# EAGLE board AM6548 (EAGLE 9.6.0), part 1 of 8
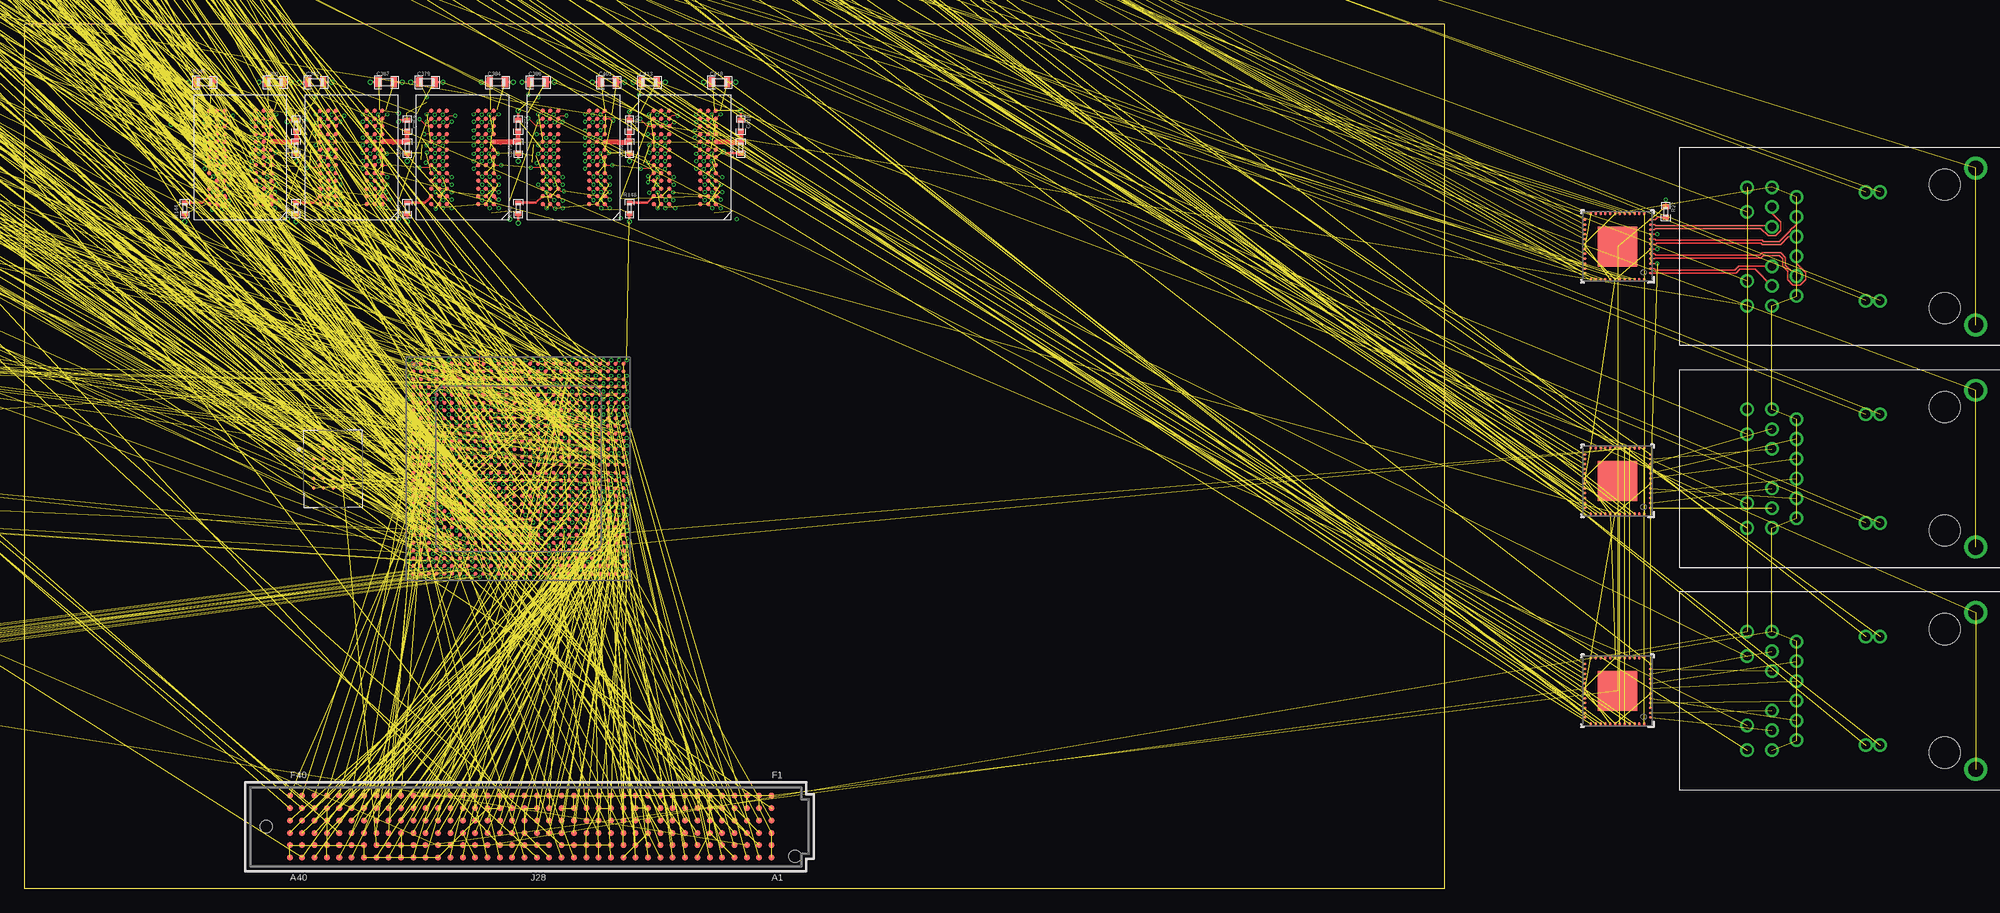
[diagram p0: board, top side]
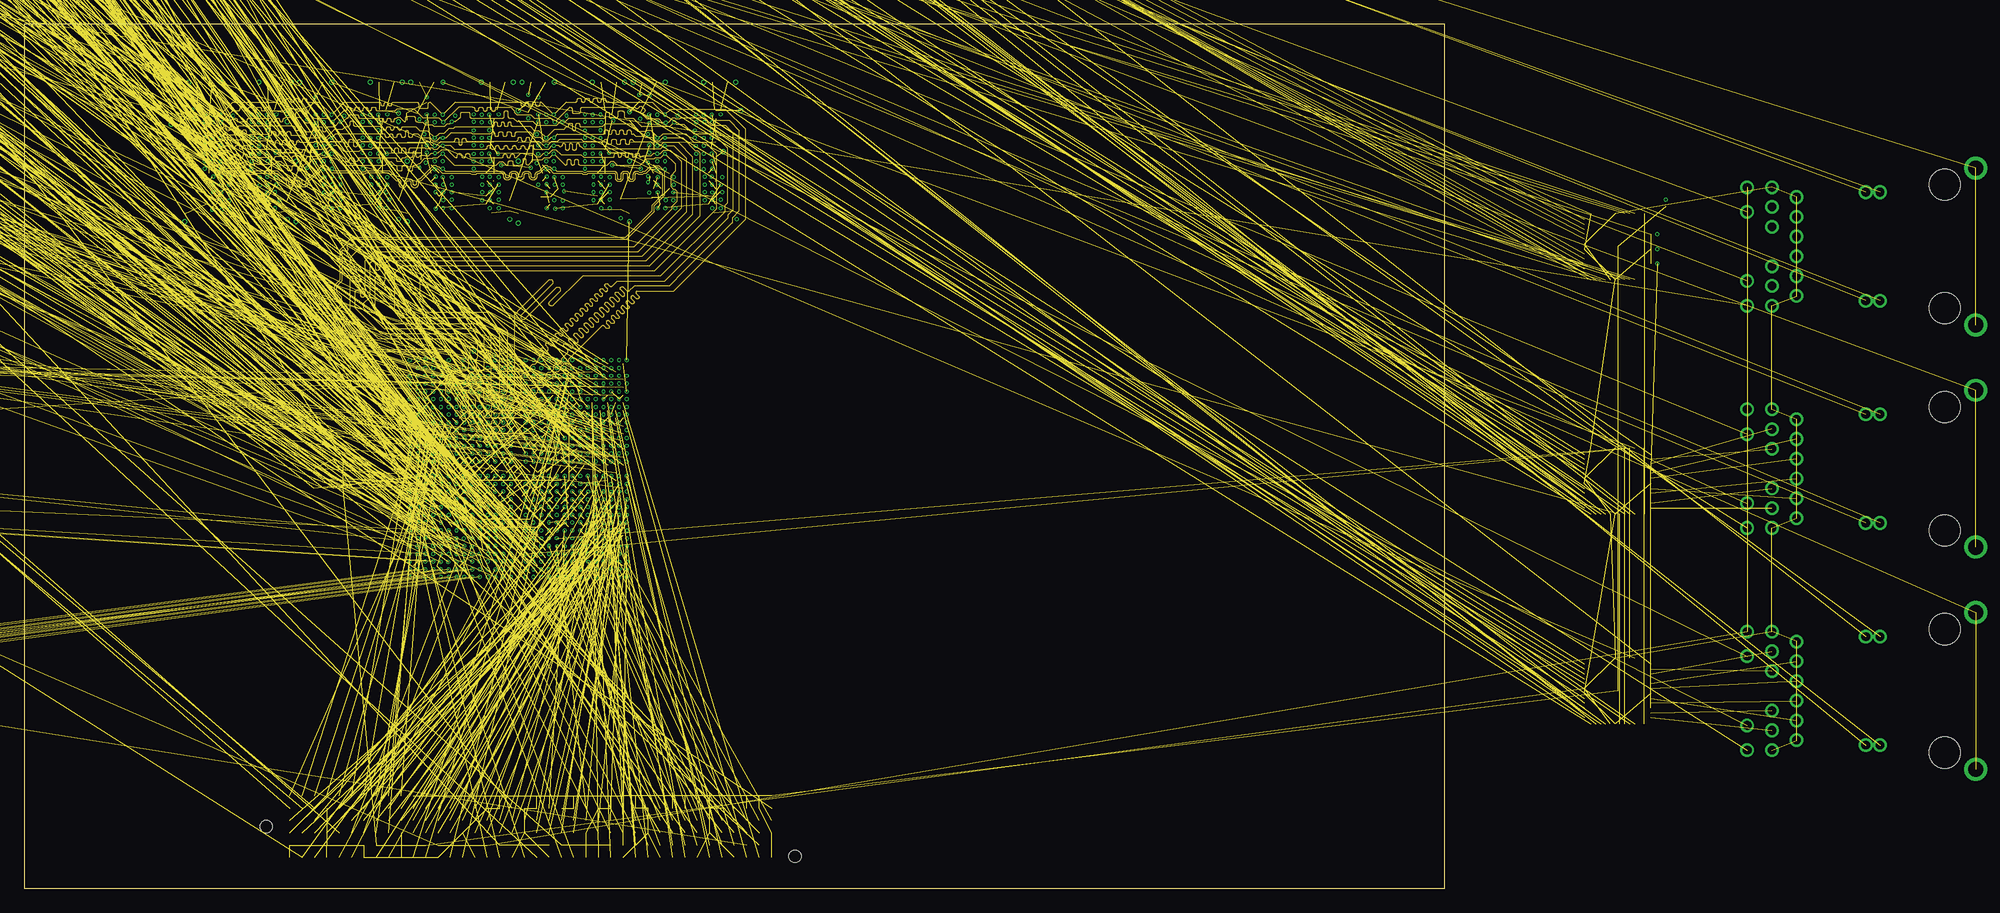
[diagram p1: board, inner layer Route3]
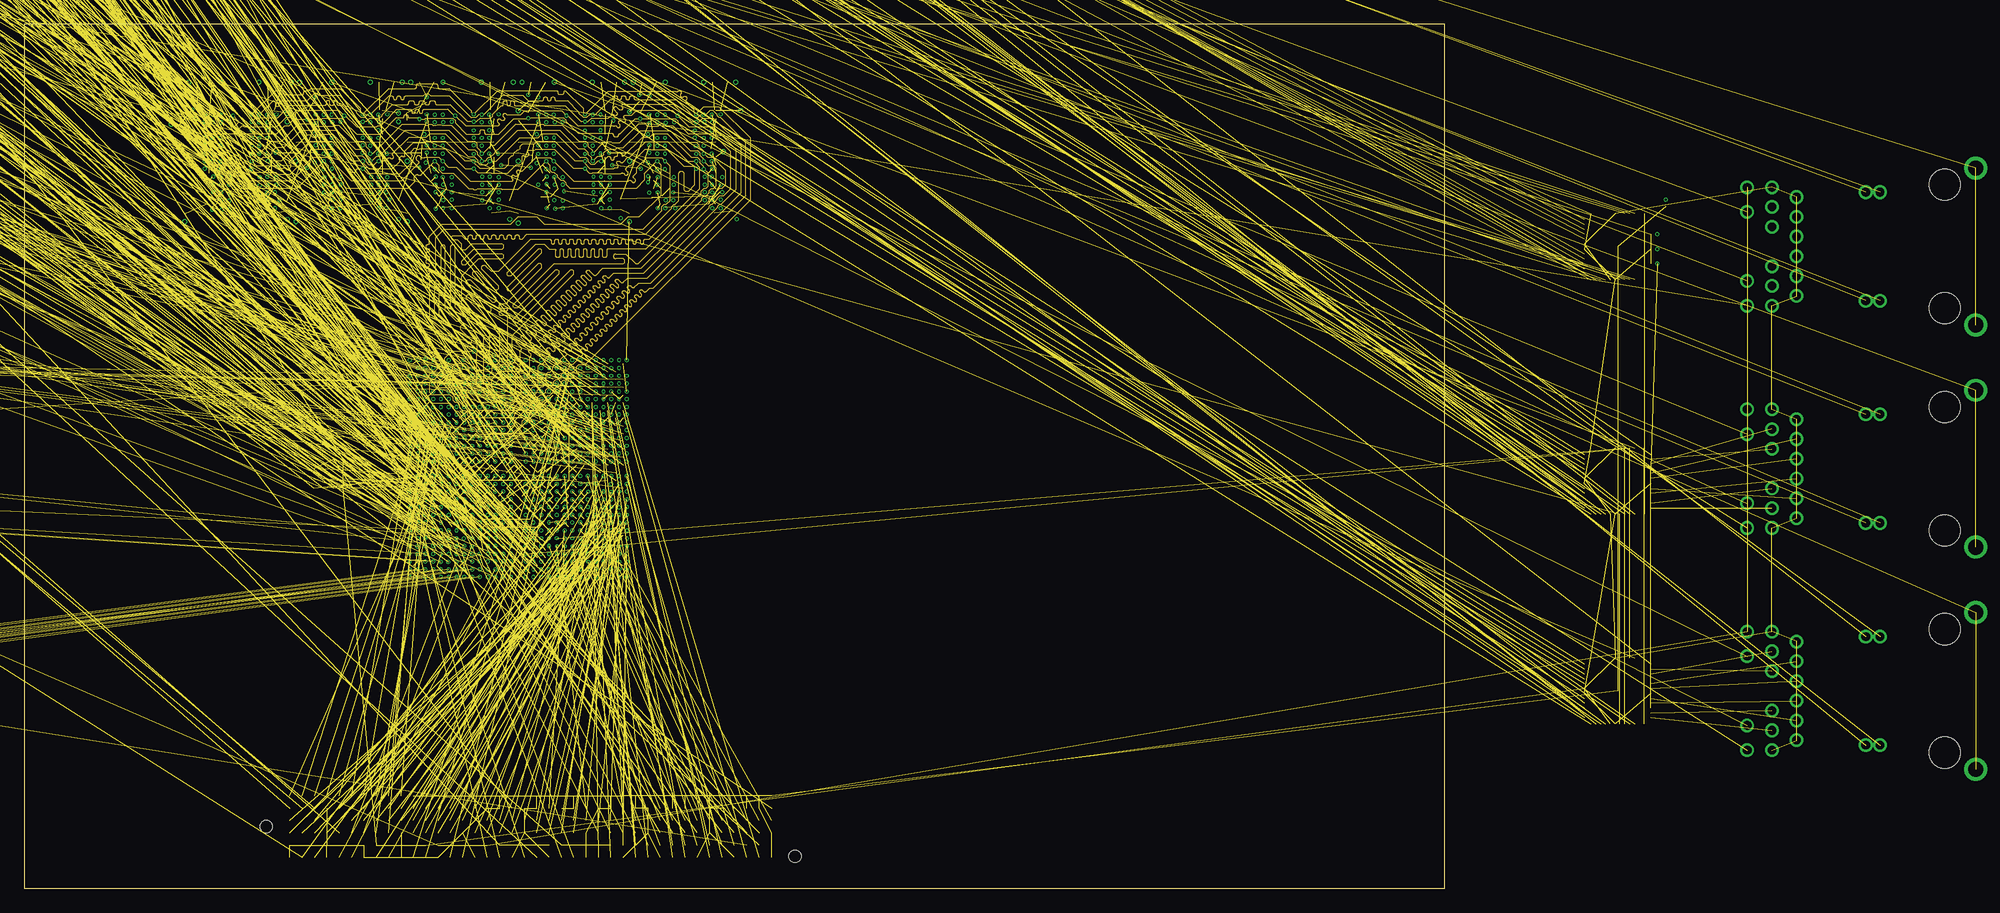
[diagram p2: board, inner layer Route5]
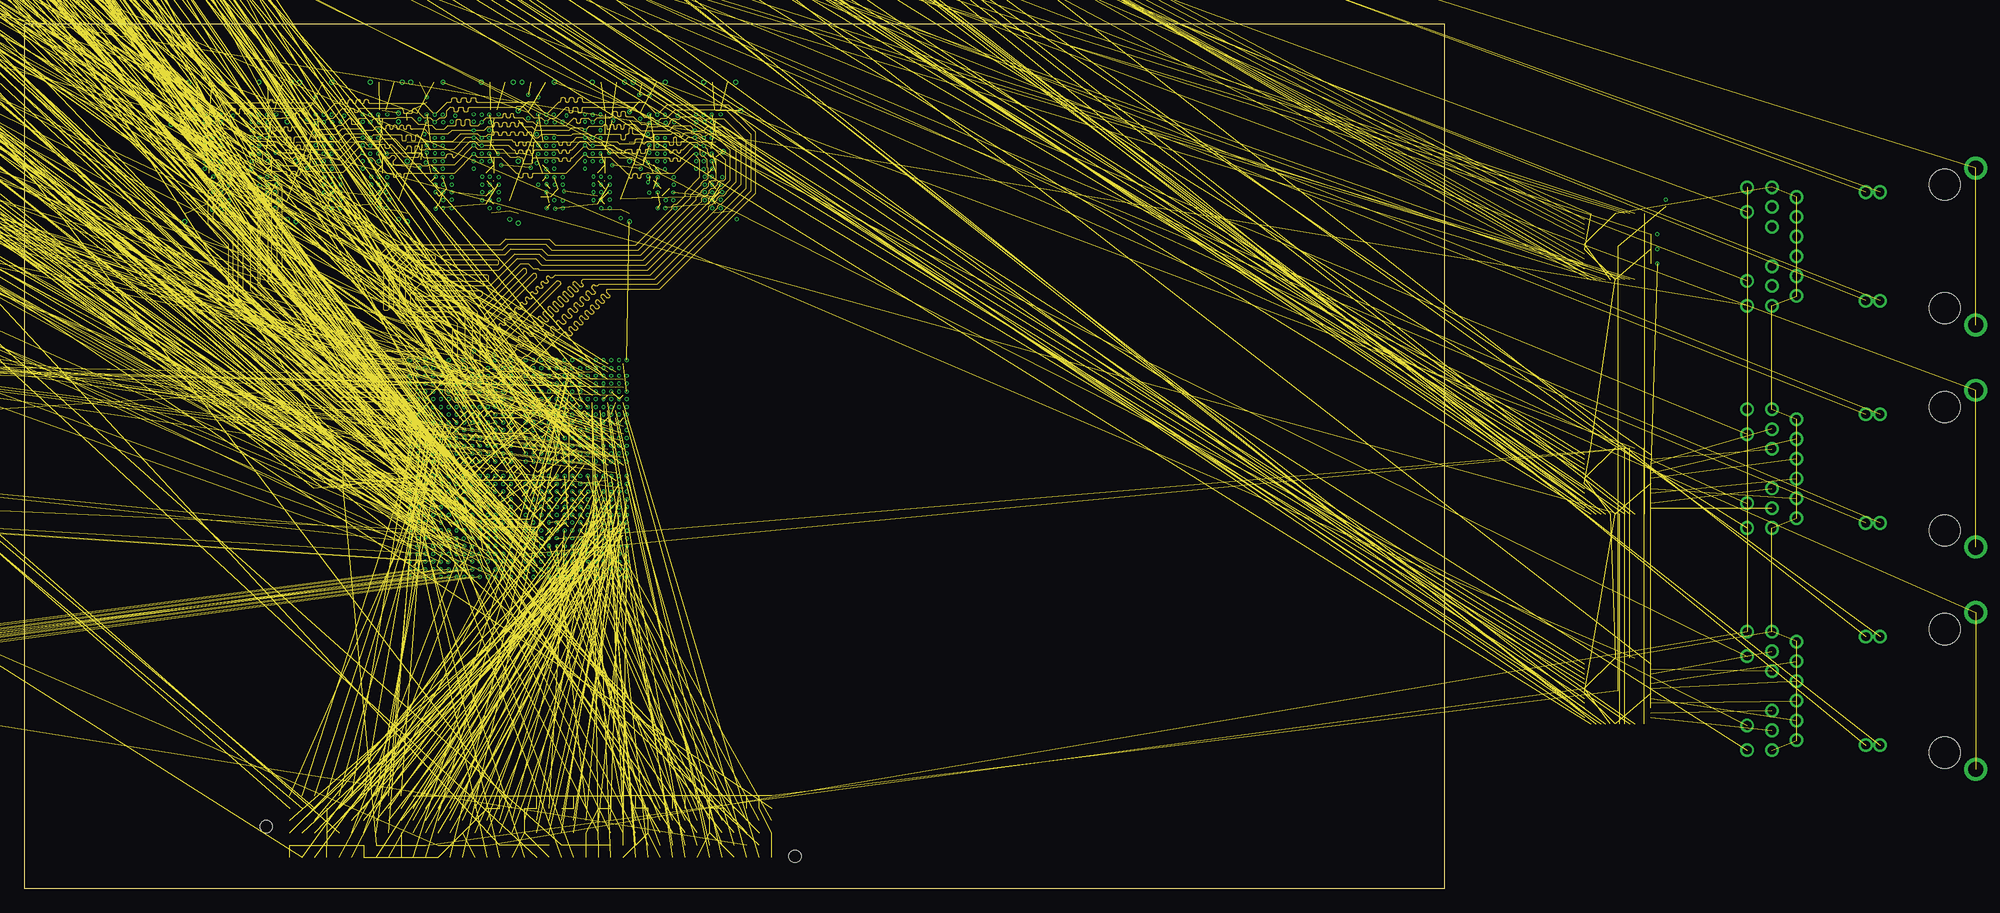
[diagram p3: board, inner layer Route11]
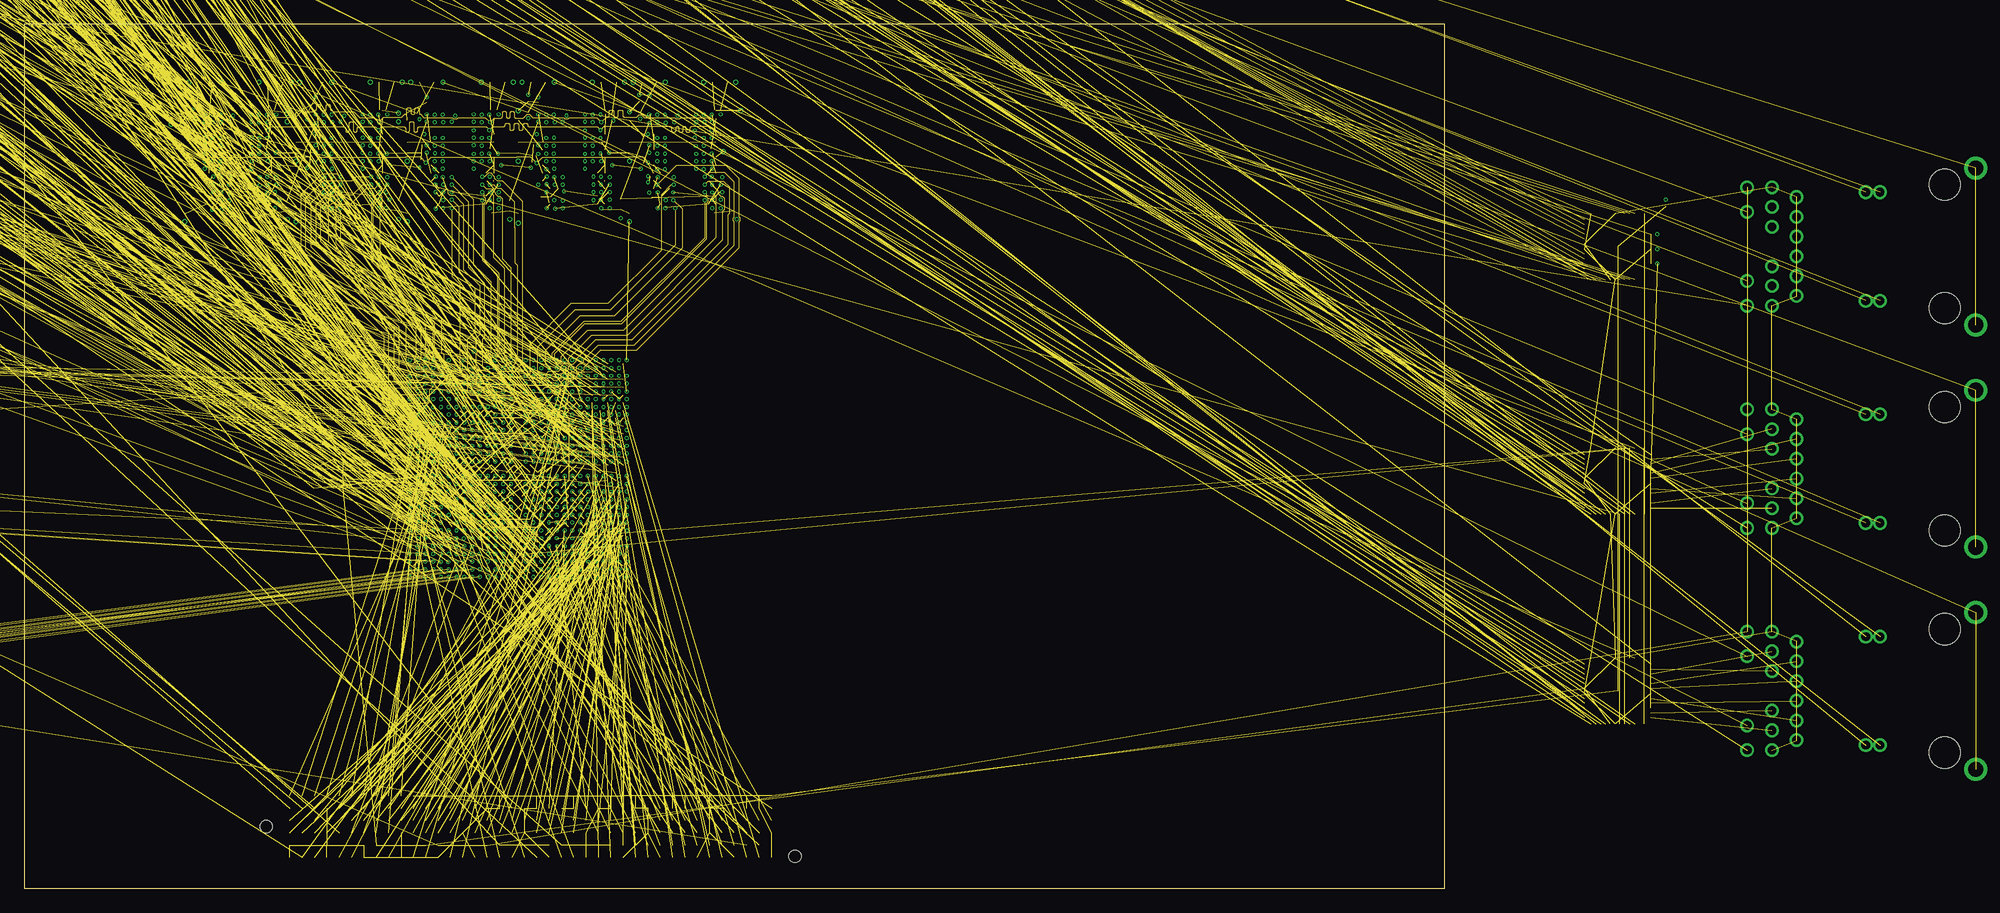
[diagram p4: board, inner layer Route13]
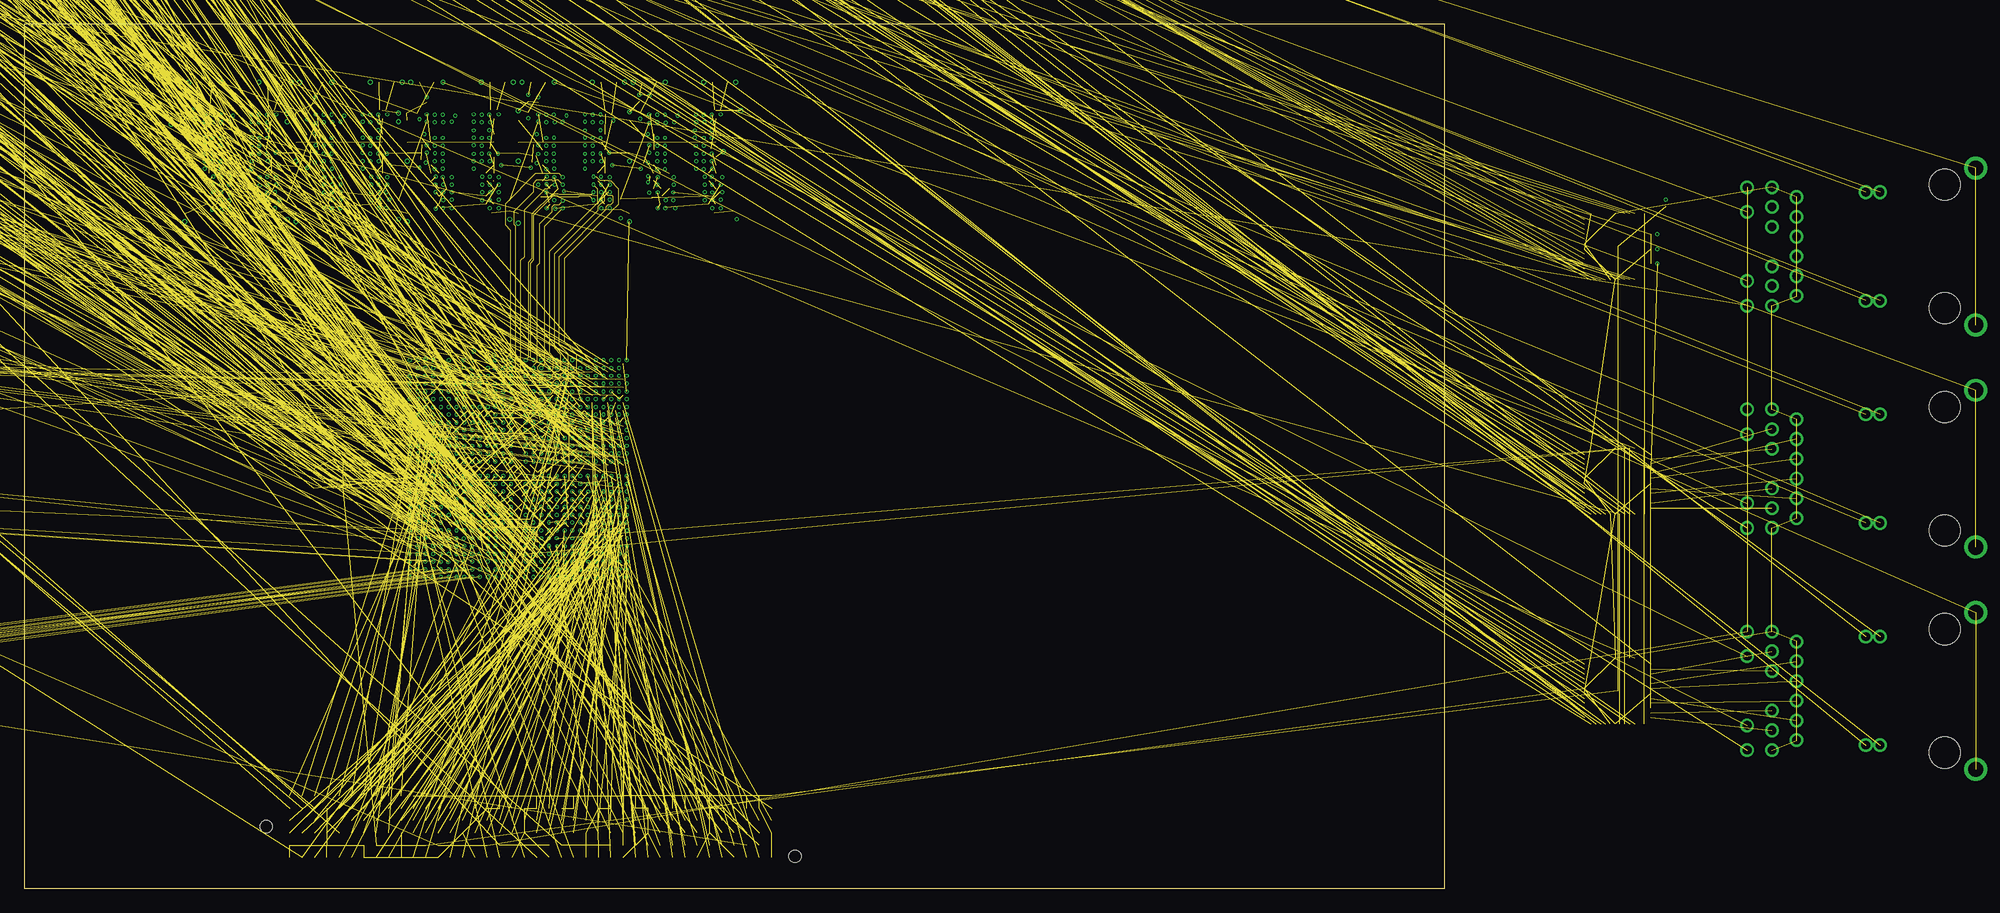
[diagram p5: board, inner layer Route15]
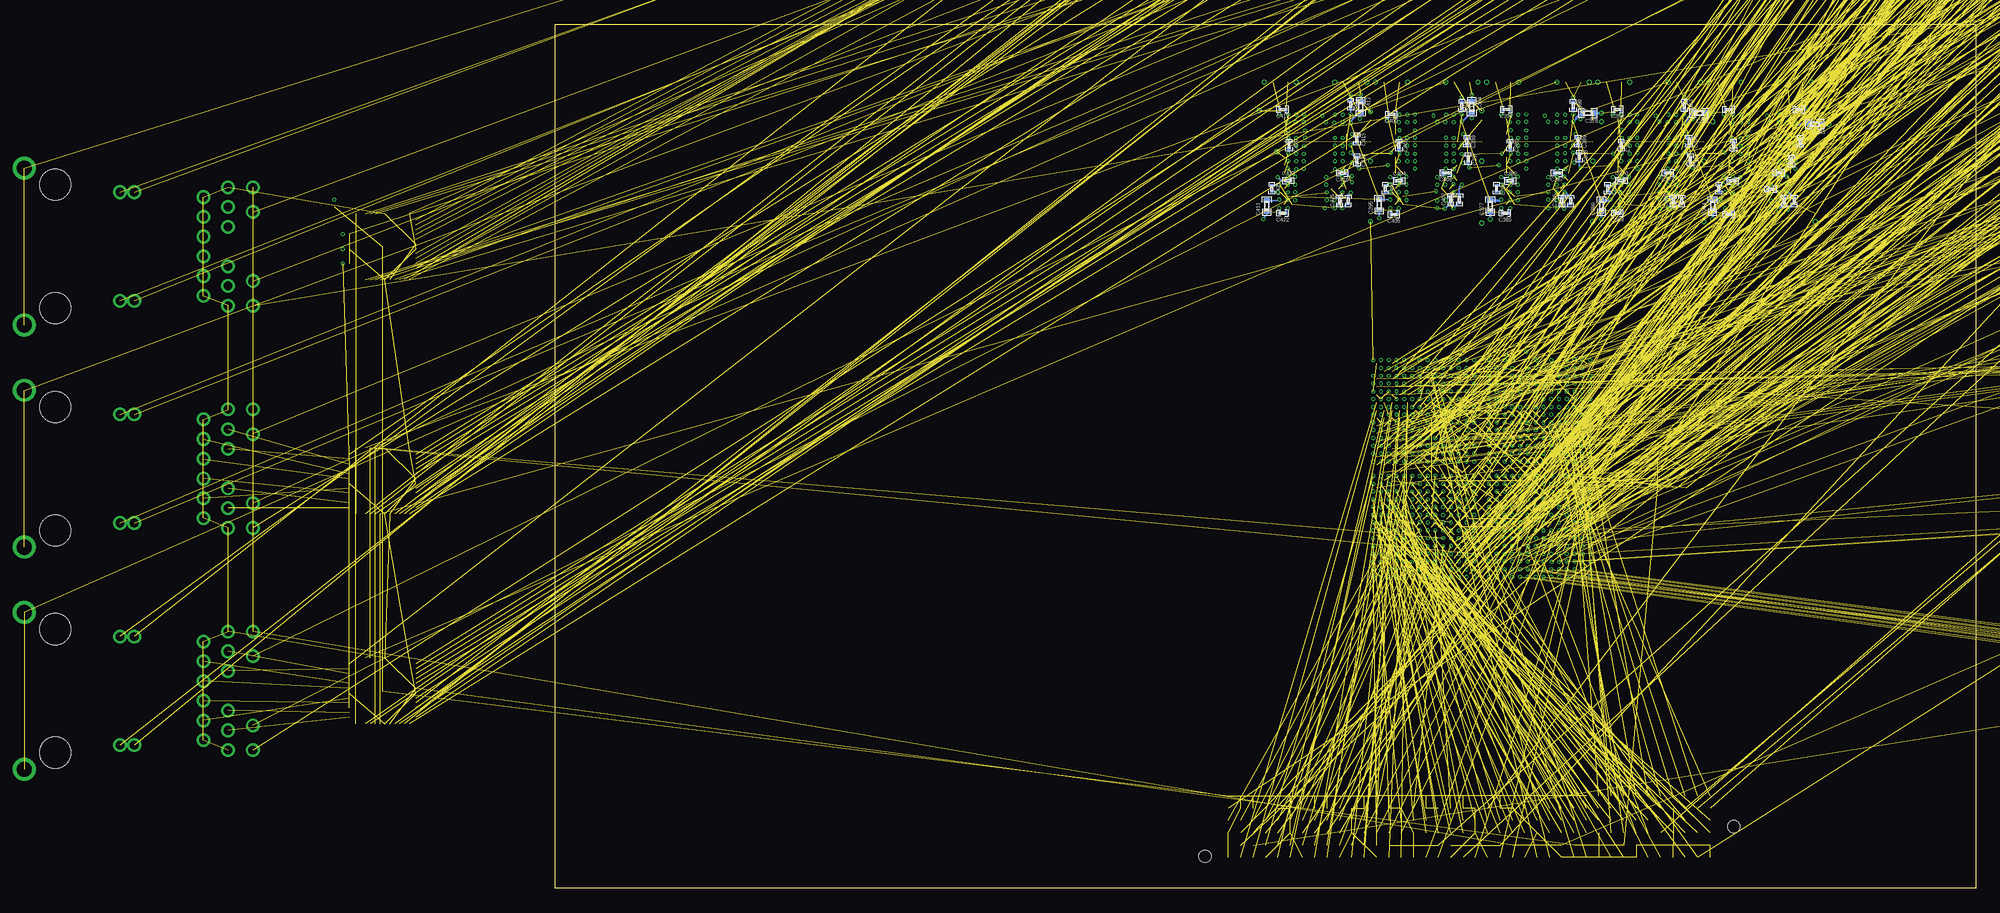
[diagram p6: board, bottom side, seen from below]

Size 146.05 x 88.9 mm. Coordinates in mm from the lower left corner, seen from the top.
Outline: 0,0 146.05,0 146.05,88.9 0,88.9 0,0
Copper layers (1+2*3+4*5+6*11+12*13+14*15+16): Top 0.035mm / dielectric 0.2mm / Route2 0.035mm / dielectric 0.15mm / Route3 0.035mm / dielectric 0.2mm / Route4 0.035mm / dielectric 0.15mm / Route5 0.035mm / dielectric 0.2mm / Route6 0.035mm / dielectric 0.15mm / Route11 0.035mm / dielectric 0.2mm / Route12 0.035mm / dielectric 0.15mm / Route13 0.035mm / dielectric 0.2mm / Route14 0.035mm / dielectric 0.15mm / Route15 0.035mm / dielectric 0.2mm / Bottom 0.035mm
Design rules "default *": minimum track width 4mil, minimum drill 0.15mm, track to track 4mil, track to pad 4mil, pad to pad 4mil, via to via 4mil, smd to smd 4mil, copper to edge 40mil, drill to drill 6mil, minimum pad ring 10mil, minimum via ring 4mil, stop-mask expansion 4mil, vias tented up to drill 0mil, thermal gap 10mil
Net classes: 0 default: width 0.102 mm, clearance 0.102 mm; 1 addr: width 0.102 mm, clearance 0.102 mm; 2 data: width 0.102 mm, clearance 0.102 mm; 3 clk: width 0.102 mm, clearance 0.102 mm; 4 ctrl: width 0.102 mm, clearance 0.102 mm; 5 dqs: width 0.102 mm, clearance 0.102 mm; 6 dm: width 0.102 mm, clearance 0.102 mm; 7 6mil: width 0.152 mm, clearance 0.152 mm; 8 5mil: width 0.127 mm, clearance 0.127 mm

## Footprints (pad centres in the part's own frame; a part is rotated, then mirrored left to right if it is on the bottom)
0603 = smd 0.65 x 1: 1 -0.775,0; 2 0.775,0
0402 = smd 0.5 x 0.6: 1 -0.55,0; 2 0.55,0
0201 = smd 0.25 x 0.35: 1 -0.325,0; 2 0.325,0
0805 = smd 1.2 x 1.4: 1 -1.3,0; 2 1.3,0
E3,5-8 = drill 0.813 pad 1.6: + -1.778,0 | drill 0.813 pad 1.6 octagon: - 1.778,0
CAPPRD300W65D800H1200B = drill 0.85 pad 1.45: 1 -1.5,0; 2 1.5,0
E2,5-5 = drill 0.813 pad 1.6: + -1.27,0 | drill 0.813 pad 1.6 octagon: - 1.27,0
E2-4 = drill 0.813 pad 1.422: + -1.016,0 | drill 0.813 pad 1.422 octagon: - 1.016,0
E2-5 = drill 0.813 pad 1.422: + -1.016,0 | drill 0.813 pad 1.422 octagon: - 1.016,0
0603.LED = smd 0.8 x 0.8: P$1 -0.775,0; P$2 0.775,0
DFN100X60X45-2N = smd 0.28 x 0.52: 1 -0.325,0; 2 0.325,0
DO214BA = smd 1.8 x 1.7: A 2.05,0; C -2.05,0
0805.LED = smd 1.25 x 1.1: P$1 -1.175,0; P$2 1.175,0
SOD-323 = smd 1.35 x 0.8: A 1.27,0; C -1.27,0
TR5 = drill 0.813 pad 1.778 long: 1 -2.54,0; 2 2.54,0
SEAF-10-XX.X-XX-04-X-A = smd 0.635 x 0.635: A1 5.715,-1.905; A2 4.445,-1.905; A3 3.175,-1.905; A4 1.905,-1.905; A5 0.635,-1.905; A6 -0.635,-1.905; A7 -1.905,-1.905; A8 -3.175,-1.905; A9 -4.445,-1.905; A10 -5.715,-1.905; B1 5.715,-0.635; B2 4.445,-0.635; B3 3.175,-0.635; B4 1.905,-0.635; B5 0.635,-0.635; B6 -0.635,-0.635; B7 -1.905,-0.635; B8 -3.175,-0.635; B9 -4.445,-0.635; B10 -5.715,-0.635; C1 5.715,0.635; C2 4.445,0.635; C3 3.175,0.635; C4 1.905,0.635; C5 0.635,0.635; C6 -0.635,0.635; C7 -1.905,0.635; C8 -3.175,0.635; C9 -4.445,0.635; C10 -5.715,0.635; D1 5.715,1.905; D2 4.445,1.905; D3 3.175,1.905; D4 1.905,1.905; D5 0.635,1.905; D6 -0.635,1.905; D7 -1.905,1.905; D8 -3.175,1.905; D9 -4.445,1.905; D10 -5.715,1.905 | hole 1.27: 8.141,-2.007; -8.141,0
1X2-3.5MM = drill 1 pad 2.184: 1 1.8,0; 2 -1.7,0
SEAF-40-XX.X-XX-06-X-A = smd 0.635 x 0.635: A1 24.765,-3.175; A2 23.495,-3.175; A3 22.225,-3.175; A4 20.955,-3.175; A5 19.685,-3.175; A6 18.415,-3.175; A7 17.145,-3.175; A8 15.875,-3.175; A9 14.605,-3.175; A10 13.335,-3.175; A11 12.065,-3.175; A12 10.795,-3.175; A13 9.525,-3.175; A14 8.255,-3.175; A15 6.985,-3.175; A16 5.715,-3.175; A17 4.445,-3.175; A18 3.175,-3.175; A19 1.905,-3.175; A20 0.635,-3.175; A21 -0.635,-3.175; A22 -1.905,-3.175; A23 -3.175,-3.175; A24 -4.445,-3.175; A25 -5.715,-3.175; A26 -6.985,-3.175; A27 -8.255,-3.175; A28 -9.525,-3.175; A29 -10.795,-3.175; A30 -12.065,-3.175; A31 -13.335,-3.175; A32 -14.605,-3.175; A33 -15.875,-3.175; A34 -17.145,-3.175; A35 -18.415,-3.175; A36 -19.685,-3.175; A37 -20.955,-3.175; A38 -22.225,-3.175; A39 -23.495,-3.175; A40 -24.765,-3.175; B1 24.765,-1.905; B2 23.495,-1.905; B3 22.225,-1.905; B4 20.955,-1.905; B5 19.685,-1.905; B6 18.415,-1.905; B7 17.145,-1.905; B8 15.875,-1.905; B9 14.605,-1.905; B10 13.335,-1.905; B11 12.065,-1.905; B12 10.795,-1.905; B13 9.525,-1.905; B14 8.255,-1.905; B15 6.985,-1.905; B16 5.715,-1.905; B17 4.445,-1.905; B18 3.175,-1.905; B19 1.905,-1.905; B20 0.635,-1.905; B21 -0.635,-1.905; B22 -1.905,-1.905; B23 -3.175,-1.905; B24 -4.445,-1.905; B25 -5.715,-1.905; B26 -6.985,-1.905; B27 -8.255,-1.905; B28 -9.525,-1.905; B29 -10.795,-1.905; B30 -12.065,-1.905; B31 -13.335,-1.905; B32 -14.605,-1.905; B33 -15.875,-1.905; B34 -17.145,-1.905; B35 -18.415,-1.905; B36 -19.685,-1.905; B37 -20.955,-1.905; B38 -22.225,-1.905; B39 -23.495,-1.905; B40 -24.765,-1.905; C1 24.765,-0.635; C2 23.495,-0.635; C3 22.225,-0.635; C4 20.955,-0.635; C5 19.685,-0.635; C6 18.415,-0.635; C7 17.145,-0.635; C8 15.875,-0.635; C9 14.605,-0.635; C10 13.335,-0.635; C11 12.065,-0.635; C12 10.795,-0.635; C13 9.525,-0.635; C14 8.255,-0.635; C15 6.985,-0.635; C16 5.715,-0.635; C17 4.445,-0.635; C18 3.175,-0.635; C19 1.905,-0.635; C20 0.635,-0.635; C21 -0.635,-0.635; C22 -1.905,-0.635; C23 -3.175,-0.635; C24 -4.445,-0.635; C25 -5.715,-0.635; C26 -6.985,-0.635; C27 -8.255,-0.635; C28 -9.525,-0.635; C29 -10.795,-0.635; C30 -12.065,-0.635; C31 -13.335,-0.635; C32 -14.605,-0.635; C33 -15.875,-0.635; C34 -17.145,-0.635; C35 -18.415,-0.635; C36 -19.685,-0.635; C37 -20.955,-0.635; C38 -22.225,-0.635; C39 -23.495,-0.635; C40 -24.765,-0.635; D1 24.765,0.635; D2 23.495,0.635; D3 22.225,0.635; D4 20.955,0.635; D5 19.685,0.635; D6 18.415,0.635; D7 17.145,0.635; D8 15.875,0.635; D9 14.605,0.635; D10 13.335,0.635; D11 12.065,0.635; D12 10.795,0.635; D13 9.525,0.635; D14 8.255,0.635; D15 6.985,0.635; D16 5.715,0.635; D17 4.445,0.635; D18 3.175,0.635; D19 1.905,0.635; D20 0.635,0.635; D21 -0.635,0.635; D22 -1.905,0.635; D23 -3.175,0.635; D24 -4.445,0.635; D25 -5.715,0.635; D26 -6.985,0.635; D27 -8.255,0.635; D28 -9.525,0.635; D29 -10.795,0.635; D30 -12.065,0.635; D31 -13.335,0.635; D32 -14.605,0.635; D33 -15.875,0.635; D34 -17.145,0.635; D35 -18.415,0.635; D36 -19.685,0.635; D37 -20.955,0.635; D38 -22.225,0.635; D39 -23.495,0.635; D40 -24.765,0.635; E1 24.765,1.905; E2 23.495,1.905; E3 22.225,1.905; E4 20.955,1.905; E5 19.685,1.905; E6 18.415,1.905; E7 17.145,1.905; E8 15.875,1.905; E9 14.605,1.905; E10 13.335,1.905; E11 12.065,1.905; E12 10.795,1.905; E13 9.525,1.905; E14 8.255,1.905; E15 6.985,1.905; E16 5.715,1.905; E17 4.445,1.905; E18 3.175,1.905; E19 1.905,1.905; E20 0.635,1.905; E21 -0.635,1.905; E22 -1.905,1.905; E23 -3.175,1.905; E24 -4.445,1.905; E25 -5.715,1.905; E26 -6.985,1.905; E27 -8.255,1.905; E28 -9.525,1.905; E29 -10.795,1.905; E30 -12.065,1.905; E31 -13.335,1.905; E32 -14.605,1.905; E33 -15.875,1.905; E34 -17.145,1.905; E35 -18.415,1.905; E36 -19.685,1.905; E37 -20.955,1.905; E38 -22.225,1.905; E39 -23.495,1.905; E40 -24.765,1.905; F1 24.765,3.175; F2 23.495,3.175; F3 22.225,3.175; F4 20.955,3.175; F5 19.685,3.175; F6 18.415,3.175; F7 17.145,3.175; F8 15.875,3.175; F9 14.605,3.175; F10 13.335,3.175; F11 12.065,3.175; F12 10.795,3.175; F13 9.525,3.175; F14 8.255,3.175; F15 6.985,3.175; F16 5.715,3.175; F17 4.445,3.175; F18 3.175,3.175; F19 1.905,3.175; F20 0.635,3.175; F21 -0.635,3.175; F22 -1.905,3.175; F23 -3.175,3.175; F24 -4.445,3.175; F25 -5.715,3.175; F26 -6.985,3.175; F27 -8.255,3.175; F28 -9.525,3.175; F29 -10.795,3.175; F30 -12.065,3.175; F31 -13.335,3.175; F32 -14.605,3.175; F33 -15.875,3.175; F34 -17.145,3.175; F35 -18.415,3.175; F36 -19.685,3.175; F37 -20.955,3.175; F38 -22.225,3.175; F39 -23.495,3.175; F40 -24.765,3.175 | hole 1.27: 27.191,-3.048; -27.191,0
1X03 = drill 1.016 long: 1 -2.54,0; 2 0,0; 3 2.54,0
2X10 = drill 1.016 octagon: 1 -11.43,-1.27; 2 -11.43,1.27; 3 -8.89,-1.27; 4 -8.89,1.27; 5 -6.35,-1.27; 6 -6.35,1.27; 7 -3.81,-1.27; 8 -3.81,1.27; 9 -1.27,-1.27; 10 -1.27,1.27; 11 1.27,-1.27; 12 1.27,1.27; 13 3.81,-1.27; 14 3.81,1.27; 15 6.35,-1.27; 16 6.35,1.27; 17 8.89,-1.27; 18 8.89,1.27; 19 11.43,-1.27; 20 11.43,1.27
2X05 = drill 1.016 octagon: 1 -5.08,-1.27; 2 -5.08,1.27; 3 -2.54,-1.27; 4 -2.54,1.27; 5 0,-1.27; 6 0,1.27; 7 2.54,-1.27; 8 2.54,1.27; 9 5.08,-1.27; 10 5.08,1.27
2X20 = drill 1.016 octagon: 1 -24.13,-1.27; 2 -24.13,1.27; 3 -21.59,-1.27; 4 -21.59,1.27; 5 -19.05,-1.27; 6 -19.05,1.27; 7 -16.51,-1.27; 8 -16.51,1.27; 9 -13.97,-1.27; 10 -13.97,1.27; 11 -11.43,-1.27; 12 -11.43,1.27; 13 -8.89,-1.27; 14 -8.89,1.27; 15 -6.35,-1.27; 16 -6.35,1.27; 17 -3.81,-1.27; 18 -3.81,1.27; 19 -1.27,-1.27; 20 -1.27,1.27; 21 1.27,-1.27; 22 1.27,1.27; 23 3.81,-1.27; 24 3.81,1.27; 25 6.35,-1.27; 26 6.35,1.27; 27 8.89,-1.27; 28 8.89,1.27; 29 11.43,-1.27; 30 11.43,1.27; 31 13.97,-1.27; 32 13.97,1.27; 33 16.51,-1.27; 34 16.51,1.27; 35 19.05,-1.27; 36 19.05,1.27; 37 21.59,-1.27; 38 21.59,1.27; 39 24.13,-1.27; 40 24.13,1.27
2X03 = drill 1.016 octagon: 1 -2.54,-1.27; 2 -2.54,1.27; 3 0,-1.27; 4 0,1.27; 5 2.54,-1.27; 6 2.54,1.27
MICRO-SD-SOCKET-SDIO = smd 1.8 x 1.4: CD1 11.92,0.4; CD2 6.22,0.4 | smd 0.8 x 1.5: CD/DAT3 6.13,10.3; CLK 9.43,10.7; CMD 7.23,10.7; DAT0 11.63,10.7; DAT1 12.73,10.7; DAT2 5.03,10.7; GND 10.53,10.9; VCC 8.33,10.9 | smd 1.4 x 1.9: GND1 0.37,14.55; GND3 13.52,13.55
SOIC127P600X175-8N = smd 1.91 x 0.6: MFP 2.46,0.635; SCL 2.46,-0.635; SDA 2.46,-1.905; VBAT -2.46,-0.635; VCC 2.46,1.905; VSS -2.46,-1.905; X1 -2.46,1.905; X2 -2.46,0.635
SOT23-3 = smd 0.8 x 0.9: 1 -0.95,-1; 2 0.95,-1; 3 0,1.1
SON65P300X315X90-9N = smd 0.7 x 0.4: 1 -1.55,0.975; 2 -1.55,0.325; 3 -1.55,-0.325; 4 -1.55,-0.975 | smd 2.51 x 2.55: 5-9 0.645,0 | drill 0.2 pad 0.25: P$6 -0.207,0; P$7 0.698,0; P$8 1.603,0; P$9 1.15,0.975; P$10 0.245,0.975; P$11 0.245,-0.975; P$12 1.15,-0.975
SOT23-R = smd 0.635 x 1.016: 1 -0.95,-1; 2 0.95,-1; 3 0,1
TO-263/D2PAK = smd 2.32 x 3.81: 1 -2.54,-7.045; 3 2.54,-7.045 | smd 11 x 9.65: 2 0,4.125
SOT23 = smd 1 x 1.4: 1 -0.95,-1.1; 2 0.95,-1.1; 3 0,1.1
1206 = smd 1.3 x 1.8: 1 -1.85,0; 2 1.85,0
R2512 = smd 1.8 x 3.2: 1 -2.8,0; 2 2.8,0
TACTILE-PTH = drill 1.016 pad 1.88: 1 -3.251,2.261; 2 3.251,2.261; 3 -3.251,-2.261; 4 3.251,-2.261
EG1218 = drill 0.9 pad 1.676: O -2.54,0; P 0,0; S 2.54,0
SMS-010 = smd 1.092 x 2.007: 1 -11.43,-4.496; 2 -8.89,-4.496; 3 -6.35,-4.496; 4 -3.81,-4.496; 5 -1.27,-4.496; 6 1.27,-4.496; 7 3.81,-4.496; 8 6.35,-4.496; 9 8.89,-4.496; 10 11.43,-4.496; 11 11.43,4.496; 12 8.89,4.496; 13 6.35,4.496; 14 3.81,4.496; 15 1.27,4.496; 16 -1.27,4.496; 17 -3.81,4.496; 18 -6.35,4.496; 19 -8.89,4.496; 20 -11.43,4.496
SMS-004 = smd 1.092 x 2.007: 1 -3.81,-4.496; 2 -1.27,-4.496; 3 1.27,-4.496; 4 3.81,-4.496; 5 3.81,4.496; 6 1.27,4.496; 7 -1.27,4.496; 8 -3.81,4.496
SMA-DIODE = smd 1.27 x 1.47: A -2.15,0; C 2.15,0
TESTPAD_B1,27 = smd 1.27 x 1.27: TP 0,0
ACD0784A = smd 0.4 x 0.4: A1 -10.8,10.8; A2 -10,10.8; A3 -9.2,10.8; A4 -8.4,10.8; A5 -7.6,10.8; A6 -6.8,10.8; A7 -6,10.8; A8 -5.2,10.8; A9 -4.4,10.8; A10 -3.6,10.8; A11 -2.8,10.8; A12 -2,10.8; A13 -1.2,10.8; A14 -0.4,10.8; A15 0.4,10.8; A16 1.2,10.8; A17 2,10.8; A18 2.8,10.8; A19 3.6,10.8; A20 4.4,10.8; A21 5.2,10.8; A22 6,10.8; A23 6.8,10.8; A24 7.6,10.8; A25 8.4,10.8; A26 9.2,10.8; A27 10,10.8; A28 10.8,10.8; AA1 -10.8,-5.2; AA2 -10,-5.2; AA3 -9.2,-5.2; AA4 -8.4,-5.2; AA5 -7.6,-5.2; AA6 -6.8,-5.2; AA7 -6,-5.2; AA8 -5.2,-5.2; AA9 -4.4,-5.2; AA10 -3.6,-5.2; AA11 -2.8,-5.2; AA12 -2,-5.2; AA13 -1.2,-5.2; AA14 -0.4,-5.2; AA15 0.4,-5.2; AA16 1.2,-5.2; AA17 2,-5.2; AA18 2.8,-5.2; AA19 3.6,-5.2; AA20 4.4,-5.2; AA21 5.2,-5.2; AA22 6,-5.2; AA23 6.8,-5.2; AA24 7.6,-5.2; AA25 8.4,-5.2; AA26 9.2,-5.2; AA27 10,-5.2; AA28 10.8,-5.2; AB1 -10.8,-6; AB2 -10,-6; AB3 -9.2,-6; AB4 -8.4,-6; AB5 -7.6,-6; AB6 -6.8,-6; AB7 -6,-6; AB8 -5.2,-6; AB9 -4.4,-6; AB10 -3.6,-6; AB11 -2.8,-6; AB12 -2,-6; AB13 -1.2,-6; AB14 -0.4,-6; AB15 0.4,-6; AB16 1.2,-6; AB17 2,-6; AB18 2.8,-6; AB19 3.6,-6; AB20 4.4,-6; AB21 5.2,-6; AB22 6,-6; AB23 6.8,-6; AB24 7.6,-6; AB25 8.4,-6; AB26 9.2,-6; AB27 10,-6; AB28 10.8,-6; AC1 -10.8,-6.8; AC2 -10,-6.8; AC3 -9.2,-6.8; AC4 -8.4,-6.8; AC5 -7.6,-6.8; AC6 -6.8,-6.8; AC7 -6,-6.8; AC8 -5.2,-6.8; AC9 -4.4,-6.8; AC10 -3.6,-6.8; AC11 -2.8,-6.8; AC12 -2,-6.8; AC13 -1.2,-6.8; AC14 -0.4,-6.8; AC15 0.4,-6.8; AC16 1.2,-6.8; AC17 2,-6.8; AC18 2.8,-6.8; AC19 3.6,-6.8; AC20 4.4,-6.8; AC21 5.2,-6.8; AC22 6,-6.8; AC23 6.8,-6.8; AC24 7.6,-6.8; AC25 8.4,-6.8; AC26 9.2,-6.8; AC27 10,-6.8; AC28 10.8,-6.8; AD1 -10.8,-7.6; AD2 -10,-7.6; AD3 -9.2,-7.6; AD4 -8.4,-7.6; AD5 -7.6,-7.6; AD6 -6.8,-7.6; AD7 -6,-7.6; AD8 -5.2,-7.6; AD9 -4.4,-7.6; AD10 -3.6,-7.6; AD11 -2.8,-7.6; AD12 -2,-7.6; AD13 -1.2,-7.6; AD14 -0.4,-7.6; AD15 0.4,-7.6; AD16 1.2,-7.6; AD17 2,-7.6; AD18 2.8,-7.6; AD19 3.6,-7.6; AD20 4.4,-7.6; AD21 5.2,-7.6; AD22 6,-7.6; AD23 6.8,-7.6; AD24 7.6,-7.6; AD25 8.4,-7.6; AD26 9.2,-7.6; AD27 10,-7.6; AD28 10.8,-7.6; AE1 -10.8,-8.4; AE2 -10,-8.4; AE3 -9.2,-8.4; AE4 -8.4,-8.4; AE5 -7.6,-8.4; AE6 -6.8,-8.4; AE7 -6,-8.4; AE8 -5.2,-8.4; AE9 -4.4,-8.4; AE10 -3.6,-8.4; AE11 -2.8,-8.4; AE12 -2,-8.4; AE13 -1.2,-8.4; AE14 -0.4,-8.4; AE15 0.4,-8.4; AE16 1.2,-8.4; AE17 2,-8.4; AE18 2.8,-8.4; AE19 3.6,-8.4; AE20 4.4,-8.4; AE21 5.2,-8.4; AE22 6,-8.4; AE23 6.8,-8.4; AE24 7.6,-8.4; AE25 8.4,-8.4; AE26 9.2,-8.4; AE27 10,-8.4; AE28 10.8,-8.4; AF1 -10.8,-9.2; AF2 -10,-9.2; AF3 -9.2,-9.2; AF4 -8.4,-9.2; AF5 -7.6,-9.2; AF6 -6.8,-9.2; AF7 -6,-9.2; AF8 -5.2,-9.2; AF9 -4.4,-9.2; AF10 -3.6,-9.2; AF11 -2.8,-9.2; AF12 -2,-9.2; AF13 -1.2,-9.2; AF14 -0.4,-9.2; AF15 0.4,-9.2; AF16 1.2,-9.2; AF17 2,-9.2; AF18 2.8,-9.2; AF19 3.6,-9.2; AF20 4.4,-9.2; AF21 5.2,-9.2; AF22 6,-9.2; AF23 6.8,-9.2; AF24 7.6,-9.2; AF25 8.4,-9.2; AF26 9.2,-9.2; AF27 10,-9.2; AF28 10.8,-9.2; AG1 -10.8,-10; AG2 -10,-10; AG3 -9.2,-10; AG4 -8.4,-10; AG5 -7.6,-10; AG6 -6.8,-10; AG7 -6,-10; AG8 -5.2,-10; AG9 -4.4,-10; AG10 -3.6,-10; AG11 -2.8,-10; AG12 -2,-10; AG13 -1.2,-10; AG14 -0.4,-10; AG15 0.4,-10; AG16 1.2,-10; AG17 2,-10; AG18 2.8,-10; AG19 3.6,-10; AG20 4.4,-10; AG21 5.2,-10; AG22 6,-10; AG23 6.8,-10; AG24 7.6,-10; AG25 8.4,-10; AG26 9.2,-10; AG27 10,-10; AG28 10.8,-10; AH1 -10.8,-10.8; AH2 -10,-10.8; AH3 -9.2,-10.8; AH4 -8.4,-10.8; AH5 -7.6,-10.8; AH6 -6.8,-10.8; AH7 -6,-10.8; AH8 -5.2,-10.8; AH9 -4.4,-10.8; AH10 -3.6,-10.8; AH11 -2.8,-10.8; AH12 -2,-10.8; AH13 -1.2,-10.8; AH14 -0.4,-10.8; AH15 0.4,-10.8; AH16 1.2,-10.8; AH17 2,-10.8; AH18 2.8,-10.8; AH19 3.6,-10.8; AH20 4.4,-10.8; AH21 5.2,-10.8; AH22 6,-10.8; AH23 6.8,-10.8; AH24 7.6,-10.8; AH25 8.4,-10.8; AH26 9.2,-10.8; AH27 10,-10.8; AH28 10.8,-10.8; B1 -10.8,10; B2 -10,10; B3 -9.2,10; B4 -8.4,10; B5 -7.6,10; B6 -6.8,10; B7 -6,10; B8 -5.2,10; B9 -4.4,10; B10 -3.6,10; B11 -2.8,10; B12 -2,10; B13 -1.2,10; B14 -0.4,10; B15 0.4,10; B16 1.2,10; B17 2,10; B18 2.8,10; B19 3.6,10; B20 4.4,10; B21 5.2,10; B22 6,10; B23 6.8,10; B24 7.6,10; B25 8.4,10; B26 9.2,10; B27 10,10; B28 10.8,10; C1 -10.8,9.2; C2 -10,9.2; C3 -9.2,9.2; C4 -8.4,9.2; C5 -7.6,9.2; C6 -6.8,9.2; C7 -6,9.2; C8 -5.2,9.2; C9 -4.4,9.2; C10 -3.6,9.2; C11 -2.8,9.2; C12 -2,9.2; C13 -1.2,9.2; C14 -0.4,9.2; C15 0.4,9.2; C16 1.2,9.2; C17 2,9.2; C18 2.8,9.2; C19 3.6,9.2; C20 4.4,9.2; C21 5.2,9.2; C22 6,9.2; C23 6.8,9.2; C24 7.6,9.2; C25 8.4,9.2; C26 9.2,9.2; C27 10,9.2; C28 10.8,9.2; D1 -10.8,8.4; D2 -10,8.4; D3 -9.2,8.4; D4 -8.4,8.4; D5 -7.6,8.4; D6 -6.8,8.4; D7 -6,8.4; D8 -5.2,8.4; D9 -4.4,8.4; D10 -3.6,8.4; D11 -2.8,8.4; D12 -2,8.4; D13 -1.2,8.4; D14 -0.4,8.4; D15 0.4,8.4; D16 1.2,8.4; D17 2,8.4; D18 2.8,8.4; D19 3.6,8.4; D20 4.4,8.4; D21 5.2,8.4; D22 6,8.4; D23 6.8,8.4; D24 7.6,8.4; D25 8.4,8.4; D26 9.2,8.4; D27 10,8.4; D28 10.8,8.4; E1 -10.8,7.6; E2 -10,7.6; E3 -9.2,7.6; E4 -8.4,7.6; E5 -7.6,7.6; E6 -6.8,7.6; E7 -6,7.6; E8 -5.2,7.6; E9 -4.4,7.6; E10 -3.6,7.6; E11 -2.8,7.6; E12 -2,7.6; E13 -1.2,7.6; E14 -0.4,7.6; E15 0.4,7.6; E16 1.2,7.6; E17 2,7.6; E18 2.8,7.6; E19 3.6,7.6; E20 4.4,7.6; E21 5.2,7.6; E22 6,7.6; E23 6.8,7.6; E24 7.6,7.6; E25 8.4,7.6; E26 9.2,7.6; E27 10,7.6; E28 10.8,7.6; F1 -10.8,6.8; F2 -10,6.8; F3 -9.2,6.8; F4 -8.4,6.8; F5 -7.6,6.8; F6 -6.8,6.8; F7 -6,6.8; F8 -5.2,6.8; F9 -4.4,6.8; F10 -3.6,6.8; F11 -2.8,6.8; F12 -2,6.8; F13 -1.2,6.8; F14 -0.4,6.8; F15 0.4,6.8; F16 1.2,6.8; F17 2,6.8; F18 2.8,6.8; F19 3.6,6.8; F20 4.4,6.8; F21 5.2,6.8; F22 6,6.8; F23 6.8,6.8; F24 7.6,6.8; F25 8.4,6.8; F26 9.2,6.8; F27 10,6.8; F28 10.8,6.8; G1 -10.8,6; G2 -10,6; G3 -9.2,6; G4 -8.4,6; G5 -7.6,6; G6 -6.8,6; G7 -6,6; G8 -5.2,6; G9 -4.4,6; G10 -3.6,6; G11 -2.8,6; G12 -2,6; G13 -1.2,6; G14 -0.4,6; G15 0.4,6; G16 1.2,6; G17 2,6; G18 2.8,6; G19 3.6,6; G20 4.4,6; G21 5.2,6; G22 6,6; G23 6.8,6; G24 7.6,6; G25 8.4,6; G26 9.2,6; G27 10,6; G28 10.8,6; H1 -10.8,5.2; H2 -10,5.2; H3 -9.2,5.2; H4 -8.4,5.2; H5 -7.6,5.2; H6 -6.8,5.2; H7 -6,5.2; H8 -5.2,5.2; H9 -4.4,5.2; H10 -3.6,5.2; H11 -2.8,5.2; H12 -2,5.2; H13 -1.2,5.2; H14 -0.4,5.2; H15 0.4,5.2; H16 1.2,5.2; H17 2,5.2; H18 2.8,5.2; H19 3.6,5.2; H20 4.4,5.2; H21 5.2,5.2; H22 6,5.2; H23 6.8,5.2; H24 7.6,5.2; H25 8.4,5.2; H26 9.2,5.2; H27 10,5.2; H28 10.8,5.2; J1 -10.8,4.4; J2 -10,4.4; J3 -9.2,4.4; J4 -8.4,4.4; J5 -7.6,4.4; J6 -6.8,4.4; J7 -6,4.4; J8 -5.2,4.4; J9 -4.4,4.4; J10 -3.6,4.4; J11 -2.8,4.4; J12 -2,4.4; J13 -1.2,4.4; J14 -0.4,4.4; J15 0.4,4.4; J16 1.2,4.4; J17 2,4.4; J18 2.8,4.4; J19 3.6,4.4; J20 4.4,4.4; J21 5.2,4.4; J22 6,4.4; J23 6.8,4.4; J24 7.6,4.4; J25 8.4,4.4; J26 9.2,4.4; J27 10,4.4; J28 10.8,4.4; K1 -10.8,3.6; K2 -10,3.6; K3 -9.2,3.6; K4 -8.4,3.6; K5 -7.6,3.6; K6 -6.8,3.6; K7 -6,3.6; K8 -5.2,3.6; K9 -4.4,3.6; K10 -3.6,3.6; K11 -2.8,3.6; K12 -2,3.6; K13 -1.2,3.6; K14 -0.4,3.6; K15 0.4,3.6; K16 1.2,3.6; K17 2,3.6; K18 2.8,3.6; K19 3.6,3.6; K20 4.4,3.6; K21 5.2,3.6; K22 6,3.6; K23 6.8,3.6; K24 7.6,3.6; K25 8.4,3.6; K26 9.2,3.6; K27 10,3.6; K28 10.8,3.6; L1 -10.8,2.8; L2 -10,2.8; L3 -9.2,2.8; L4 -8.4,2.8; L5 -7.6,2.8; L6 -6.8,2.8; L7 -6,2.8; L8 -5.2,2.8; L9 -4.4,2.8; L10 -3.6,2.8; L11 -2.8,2.8; L12 -2,2.8; L13 -1.2,2.8; L14 -0.4,2.8; L15 0.4,2.8; L16 1.2,2.8; L17 2,2.8; L18 2.8,2.8; L19 3.6,2.8; L20 4.4,2.8; L21 5.2,2.8; L22 6,2.8; L23 6.8,2.8; L24 7.6,2.8; L25 8.4,2.8; L26 9.2,2.8; L27 10,2.8; L28 10.8,2.8; M1 -10.8,2; M2 -10,2; M3 -9.2,2; M4 -8.4,2; M5 -7.6,2; M6 -6.8,2; M7 -6,2; M8 -5.2,2; M9 -4.4,2; M10 -3.6,2; M11 -2.8,2; M12 -2,2; M13 -1.2,2; M14 -0.4,2; M15 0.4,2; M16 1.2,2; M17 2,2; M18 2.8,2; M19 3.6,2; M20 4.4,2; M21 5.2,2; M22 6,2; M23 6.8,2; M24 7.6,2; M25 8.4,2; M26 9.2,2; M27 10,2; M28 10.8,2; N1 -10.8,1.2; N2 -10,1.2; N3 -9.2,1.2; N4 -8.4,1.2; N5 -7.6,1.2; N6 -6.8,1.2; N7 -6,1.2; N8 -5.2,1.2; N9 -4.4,1.2; N10 -3.6,1.2; N11 -2.8,1.2; N12 -2,1.2; N13 -1.2,1.2; N14 -0.4,1.2; N15 0.4,1.2; N16 1.2,1.2; N17 2,1.2; N18 2.8,1.2; N19 3.6,1.2; N20 4.4,1.2; N21 5.2,1.2; N22 6,1.2; N23 6.8,1.2; N24 7.6,1.2; N25 8.4,1.2; N26 9.2,1.2; N27 10,1.2; N28 10.8,1.2; P1 -10.8,0.4; P2 -10,0.4; P3 -9.2,0.4; P4 -8.4,0.4; P5 -7.6,0.4; P6 -6.8,0.4; P7 -6,0.4; P8 -5.2,0.4; P9 -4.4,0.4; P10 -3.6,0.4; P11 -2.8,0.4; P12 -2,0.4; P13 -1.2,0.4; P14 -0.4,0.4; P15 0.4,0.4; P16 1.2,0.4; P17 2,0.4; P18 2.8,0.4; P19 3.6,0.4; P20 4.4,0.4; P21 5.2,0.4; P22 6,0.4; P23 6.8,0.4; P24 7.6,0.4; P25 8.4,0.4; P26 9.2,0.4; P27 10,0.4; P28 10.8,0.4; R1 -10.8,-0.4; R2 -10,-0.4; R3 -9.2,-0.4; R4 -8.4,-0.4; R5 -7.6,-0.4; R6 -6.8,-0.4; R7 -6,-0.4; R8 -5.2,-0.4; R9 -4.4,-0.4; R10 -3.6,-0.4; R11 -2.8,-0.4; R12 -2,-0.4; R13 -1.2,-0.4; R14 -0.4,-0.4; R15 0.4,-0.4; R16 1.2,-0.4; R17 2,-0.4; R18 2.8,-0.4; R19 3.6,-0.4; R20 4.4,-0.4; R21 5.2,-0.4; R22 6,-0.4; R23 6.8,-0.4; R24 7.6,-0.4; R25 8.4,-0.4; R26 9.2,-0.4; R27 10,-0.4; R28 10.8,-0.4; T1 -10.8,-1.2; T2 -10,-1.2; T3 -9.2,-1.2; T4 -8.4,-1.2; T5 -7.6,-1.2; T6 -6.8,-1.2; T7 -6,-1.2; T8 -5.2,-1.2; T9 -4.4,-1.2; T10 -3.6,-1.2; T11 -2.8,-1.2; T12 -2,-1.2; T13 -1.2,-1.2; T14 -0.4,-1.2; T15 0.4,-1.2; T16 1.2,-1.2; T17 2,-1.2; T18 2.8,-1.2; T19 3.6,-1.2; T20 4.4,-1.2; T21 5.2,-1.2; T22 6,-1.2; T23 6.8,-1.2; T24 7.6,-1.2; T25 8.4,-1.2; T26 9.2,-1.2; T27 10,-1.2; T28 10.8,-1.2; U1 -10.8,-2; U2 -10,-2; U3 -9.2,-2; U4 -8.4,-2; U5 -7.6,-2; U6 -6.8,-2; U7 -6,-2; U8 -5.2,-2; U9 -4.4,-2; U10 -3.6,-2; U11 -2.8,-2; U12 -2,-2; U13 -1.2,-2; U14 -0.4,-2; U15 0.4,-2; U16 1.2,-2; U17 2,-2; U18 2.8,-2; U19 3.6,-2; U20 4.4,-2; U21 5.2,-2; U22 6,-2; U23 6.8,-2; U24 7.6,-2; U25 8.4,-2; U26 9.2,-2; U27 10,-2; U28 10.8,-2; V1 -10.8,-2.8; V2 -10,-2.8; V3 -9.2,-2.8; V4 -8.4,-2.8; V5 -7.6,-2.8; V6 -6.8,-2.8; V7 -6,-2.8; V8 -5.2,-2.8; V9 -4.4,-2.8; V10 -3.6,-2.8; V11 -2.8,-2.8; V12 -2,-2.8; V13 -1.2,-2.8; V14 -0.4,-2.8; V15 0.4,-2.8; V16 1.2,-2.8; V17 2,-2.8; V18 2.8,-2.8; V19 3.6,-2.8; V20 4.4,-2.8; V21 5.2,-2.8; V22 6,-2.8; V23 6.8,-2.8; V24 7.6,-2.8; V25 8.4,-2.8; V26 9.2,-2.8; V27 10,-2.8; V28 10.8,-2.8; W1 -10.8,-3.6; W2 -10,-3.6; W3 -9.2,-3.6; W4 -8.4,-3.6; W5 -7.6,-3.6; W6 -6.8,-3.6; W7 -6,-3.6; W8 -5.2,-3.6; W9 -4.4,-3.6; W10 -3.6,-3.6; W11 -2.8,-3.6; W12 -2,-3.6; W13 -1.2,-3.6; W14 -0.4,-3.6; W15 0.4,-3.6; W16 1.2,-3.6; W17 2,-3.6; W18 2.8,-3.6; W19 3.6,-3.6; W20 4.4,-3.6; W21 5.2,-3.6; W22 6,-3.6; W23 6.8,-3.6; W24 7.6,-3.6; W25 8.4,-3.6; W26 9.2,-3.6; W27 10,-3.6; W28 10.8,-3.6; Y1 -10.8,-4.4; Y2 -10,-4.4; Y3 -9.2,-4.4; Y4 -8.4,-4.4; Y5 -7.6,-4.4; Y6 -6.8,-4.4; Y7 -6,-4.4; Y8 -5.2,-4.4; Y9 -4.4,-4.4; Y10 -3.6,-4.4; Y11 -2.8,-4.4; Y12 -2,-4.4; Y13 -1.2,-4.4; Y14 -0.4,-4.4; Y15 0.4,-4.4; Y16 1.2,-4.4; Y17 2,-4.4; Y18 2.8,-4.4; Y19 3.6,-4.4; Y20 4.4,-4.4; Y21 5.2,-4.4; Y22 6,-4.4; Y23 6.8,-4.4; Y24 7.6,-4.4; Y25 8.4,-4.4; Y26 9.2,-4.4; Y27 10,-4.4; Y28 10.8,-4.4
DGS10 = smd 1.575 x 0.279: 1 -2.095,1; 2 -2.095,0.5; 3 -2.095,0; 4 -2.095,-0.5; 5 -2.095,-1; 6 2.095,-1; 7 2.095,-0.5; 8 2.095,0; 9 2.095,0.5; 10 2.095,1
RGJ0032A = smd 0.36 x 0.24: 1 -2.4,1.75; 2 -2.4,1.25; 3 -2.4,0.75; 4 -2.4,0.25; 5 -2.4,-0.25; 6 -2.4,-0.75; 7 -2.4,-1.25; 8 -2.4,-1.75; 17 2.4,-1.75; 18 2.4,-1.25; 19 2.4,-0.75; 20 2.4,-0.25; 21 2.4,0.25; 22 2.4,0.75; 23 2.4,1.25; 24 2.4,1.75 | smd 0.24 x 0.36: 9 -1.75,-2.4; 10 -1.25,-2.4; 11 -0.75,-2.4; 12 -0.25,-2.4; 13 0.25,-2.4; 14 0.75,-2.4; 15 1.25,-2.4; 16 1.75,-2.4; 25 1.75,2.4; 26 1.25,2.4; 27 0.75,2.4; 28 0.25,2.4; 29 -0.25,2.4; 30 -0.75,2.4; 31 -1.25,2.4; 32 -1.75,2.4 | smd 3.15 x 3.15: 33 0,0
RHL0024A = smd 0.24 x 0.36: 1 -0.75,2.65; 12 -0.75,-2.65; 13 0.75,-2.65; 24 0.75,2.65 | smd 0.36 x 0.24: 2 -1.65,2.25; 3 -1.65,1.75; 4 -1.65,1.25; 5 -1.65,0.75; 6 -1.65,0.25; 7 -1.65,-0.25; 8 -1.65,-0.75; 9 -1.65,-1.25; 10 -1.65,-1.75; 11 -1.65,-2.25; 14 1.65,-2.225; 15 1.65,-1.725; 16 1.65,-1.225; 17 1.65,-0.725; 18 1.65,-0.225; 19 1.65,0.275; 20 1.65,0.775; 21 1.65,1.275; 22 1.65,1.775; 23 1.65,2.275 | smd 2.05 x 4.05: 25 0,0
RGY16_2P55X2P05 = smd 0.28 x 0.85: 1 -0.75,1.975; 8 -0.75,-1.975; 9 0.75,-1.975; 16 0.75,1.975 | smd 0.85 x 0.28: 2 -1.733,1.25; 3 -1.733,0.75; 4 -1.733,0.25; 5 -1.733,-0.25; 6 -1.733,-0.75; 7 -1.733,-1.25; 10 1.733,-1.25; 11 1.733,-0.75; 12 1.733,-0.25; 13 1.733,0.25; 14 1.733,0.75; 15 1.733,1.25 | smd 2.05 x 2.55: 17 0,0 | drill 0.254 pad 0.508: V -0.406,-0.787; V_1 -0.406,0; V_2 -0.406,0.787; V_3 0.406,-0.787; V_4 0.406,0; V_5 0.406,0.787
RGZ0048B = smd 0.36 x 0.24: 1 -3.4,2.75; 2 -3.4,2.25; 3 -3.4,1.75; 4 -3.4,1.25; 5 -3.4,0.75; 6 -3.4,0.25; 7 -3.4,-0.25; 8 -3.4,-0.75; 9 -3.4,-1.25; 10 -3.4,-1.75; 11 -3.4,-2.25; 12 -3.4,-2.75; 25 3.4,-2.75; 26 3.4,-2.25; 27 3.4,-1.75; 28 3.4,-1.25; 29 3.4,-0.75; 30 3.4,-0.25; 31 3.4,0.25; 32 3.4,0.75; 33 3.4,1.25; 34 3.4,1.75; 35 3.4,2.25; 36 3.4,2.75 | smd 0.24 x 0.36: 13 -2.75,-3.4; 14 -2.25,-3.4; 15 -1.75,-3.4; 16 -1.25,-3.4; 17 -0.75,-3.4; 18 -0.25,-3.4; 19 0.25,-3.4; 20 0.75,-3.4; 21 1.25,-3.4; 22 1.75,-3.4; 23 2.25,-3.4; 24 2.75,-3.4; 37 2.75,3.4; 38 2.25,3.4; 39 1.75,3.4; 40 1.25,3.4; 41 0.75,3.4; 42 0.25,3.4; 43 -0.25,3.4; 44 -0.75,3.4; 45 -1.25,3.4; 46 -1.75,3.4; 47 -2.25,3.4; 48 -2.75,3.4 | smd 4.1 x 4.1: 49 0,0
RSW0010A = smd 0.7 x 0.2: 1 -0.788,-0.006 | smd 0.6 x 0.2: 2 -0.838,-0.406; 6 0.362,-0.406; 7 0.362,-0.006 | smd 0.2 x 0.6: 3 -0.638,-1.006; 4 -0.238,-1.006; 5 0.162,-1.006; 8 0.162,0.594; 9 -0.238,0.594; 10 -0.638,0.594
DCU0008A_N = smd 0.5 x 0.3: 1 -1.6,0.75; 2 -1.6,0.25; 3 -1.6,-0.25; 4 -1.6,-0.75; 5 1.6,-0.75; 6 1.6,-0.25; 7 1.6,0.25; 8 1.6,0.75
DBV0005A_N = smd 1 x 0.6: 1 -1.375,0.95; 2 -1.375,0; 3 -1.375,-0.95; 4 1.375,-0.95; 5 1.375,0.95
PDT0128A_N = smd 1.51 x 0.24: 1 -7.575,6.2; 2 -7.575,5.8; 3 -7.575,5.4; 4 -7.575,5; 5 -7.575,4.6; 6 -7.575,4.2; 7 -7.575,3.8; 8 -7.575,3.4; 9 -7.575,3; 10 -7.575,2.6; 11 -7.575,2.2; 12 -7.575,1.8; 13 -7.575,1.4; 14 -7.575,1; 15 -7.575,0.6; 16 -7.575,0.2; 17 -7.575,-0.2; 18 -7.575,-0.6; 19 -7.575,-1; 20 -7.575,-1.4; 21 -7.575,-1.8; 22 -7.575,-2.2; 23 -7.575,-2.6; 24 -7.575,-3; 25 -7.575,-3.4; 26 -7.575,-3.8; 27 -7.575,-4.2; 28 -7.575,-4.6; 29 -7.575,-5; 30 -7.575,-5.4; 31 -7.575,-5.8; 32 -7.575,-6.2; 65 7.575,-6.2; 66 7.575,-5.8; 67 7.575,-5.4; 68 7.575,-5; 69 7.575,-4.6; 70 7.575,-4.2; 71 7.575,-3.8; 72 7.575,-3.4; 73 7.575,-3; 74 7.575,-2.6; 75 7.575,-2.2; 76 7.575,-1.8; 77 7.575,-1.4; 78 7.575,-1; 79 7.575,-0.6; 80 7.575,-0.2; 81 7.575,0.2; 82 7.575,0.6; 83 7.575,1; 84 7.575,1.4; 85 7.575,1.8; 86 7.575,2.2; 87 7.575,2.6; 88 7.575,3; 89 7.575,3.4; 90 7.575,3.8; 91 7.575,4.2; 92 7.575,4.6; 93 7.575,5; 94 7.575,5.4; 95 7.575,5.8; 96 7.575,6.2 | smd 0.24 x 1.51: 33 -6.2,-7.575; 34 -5.8,-7.575; 35 -5.4,-7.575; 36 -5,-7.575; 37 -4.6,-7.575; 38 -4.2,-7.575; 39 -3.8,-7.575; 40 -3.4,-7.575; 41 -3,-7.575; 42 -2.6,-7.575; 43 -2.2,-7.575; 44 -1.8,-7.575; 45 -1.4,-7.575; 46 -1,-7.575; 47 -0.6,-7.575; 48 -0.2,-7.575; 49 0.2,-7.575; 50 0.6,-7.575; 51 1,-7.575; 52 1.4,-7.575; 53 1.8,-7.575; 54 2.2,-7.575; 55 2.6,-7.575; 56 3,-7.575; 57 3.4,-7.575; 58 3.8,-7.575; 59 4.2,-7.575; 60 4.6,-7.575; 61 5,-7.575; 62 5.4,-7.575; 63 5.8,-7.575; 64 6.2,-7.575; 97 6.2,7.575; 98 5.8,7.575; 99 5.4,7.575; 100 5,7.575; 101 4.6,7.575; 102 4.2,7.575; 103 3.8,7.575; 104 3.4,7.575; 105 3,7.575; 106 2.6,7.575; 107 2.2,7.575; 108 1.8,7.575; 109 1.4,7.575; 110 1,7.575; 111 0.6,7.575; 112 0.2,7.575; 113 -0.2,7.575; 114 -0.6,7.575; 115 -1,7.575; 116 -1.4,7.575; 117 -1.8,7.575; 118 -2.2,7.575; 119 -2.6,7.575; 120 -3,7.575; 121 -3.4,7.575; 122 -3.8,7.575; 123 -4.2,7.575; 124 -4.6,7.575; 125 -5,7.575; 126 -5.4,7.575; 127 -5.8,7.575; 128 -6.2,7.575
DRY6 = smd 0.55 x 0.3: 1 -0.355,0.5 | smd 0.52 x 0.3: 2 -0.37,0; 3 -0.37,-0.5; 4 0.37,-0.5; 5 0.37,0; 6 0.37,0.5
DCK0005A_N = smd 0.85 x 0.4: 1 -0.95,0.65; 2 -0.95,0; 3 -0.95,-0.65; 4 0.95,-0.65; 5 0.95,0.65
DQM8 = smd 0.864 x 0.254: 1 -0.495,0.6; 2 -0.495,0.2; 3 -0.495,-0.2; 4 -0.495,-0.6; 5 0.495,-0.6; 6 0.495,-0.2; 7 0.495,0.2; 8 0.495,0.6
DBV5 = smd 1.473 x 0.559: 1 -1.194,0.95; 2 -1.194,0; 3 -1.194,-0.95; 4 1.194,-0.95; 5 1.194,0.95
PW0016A_N = smd 0.95 x 0.45: 1 -2.95,2.275; 2 -2.95,1.625; 3 -2.95,0.975; 4 -2.95,0.325; 5 -2.95,-0.325; 6 -2.95,-0.975; 7 -2.95,-1.625; 8 -2.95,-2.275; 9 2.95,-2.275; 10 2.95,-1.625; 11 2.95,-0.975; 12 2.95,-0.325; 13 2.95,0.325; 14 2.95,0.975; 15 2.95,1.625; 16 2.95,2.275
RWG0040A = smd 0.6 x 0.25: 1 -2.9,2.25; 2 -2.9,1.75; 3 -2.9,1.25; 4 -2.9,0.75; 5 -2.9,0.25; 6 -2.9,-0.25; 7 -2.9,-0.75; 8 -2.9,-1.25; 9 -2.9,-1.75; 10 -2.9,-2.25; 21 2.9,-2.25; 22 2.9,-1.75; 23 2.9,-1.25; 24 2.9,-0.75; 25 2.9,-0.25; 26 2.9,0.25; 27 2.9,0.75; 28 2.9,1.25; 29 2.9,1.75; 30 2.9,2.25 | smd 0.25 x 0.6: 11 -2.25,-2.9; 12 -1.75,-2.9; 13 -1.25,-2.9; 14 -0.75,-2.9; 15 -0.25,-2.9; 16 0.25,-2.9; 17 0.75,-2.9; 18 1.25,-2.9; 19 1.75,-2.9; 20 2.25,-2.9; 31 2.25,2.9; 32 1.75,2.9; 33 1.25,2.9; 34 0.75,2.9; 35 0.25,2.9; 36 -0.25,2.9; 37 -0.75,2.9; 38 -1.25,2.9; 39 -1.75,2.9; 40 -2.25,2.9 | smd 3.3 x 3.3: 41 0,0
RLT0007A = smd 0.6 x 0.25: 1 -0.9,0.75; 2 -0.9,0.25; 3 -0.9,-0.25; 4 -0.9,-0.75 | smd 1.64 x 0.44: 5 0.45,-0.6; 6 0.45,0; 7 0.45,0.6
RWK0011B = smd 0.2 x 1.05: 1 -0.225,-0.675; 7 -0.225,0.675 | smd 0.2 x 2.4: 2 0.225,0 | smd 0.325 x 0.25: 3 0.912,-0.75; 4 0.912,-0.25; 5 0.912,0.25; 6 0.912,0.75; 8 -0.912,0.75; 9 -0.912,0.25; 10 -0.912,-0.25; 11 -0.912,-0.75
DQN0004A = smd 0.25 x 0.31: 1 -0.535,0.325; 2 -0.535,-0.325; 3 0.535,-0.325; 4 0.535,0.325 | smd 0.58 x 0.58 rotated 45: 5 0,0
YZH0016AFAF = smd 0.275 x 0.275: A1 -0.75,0.75; A2 -0.25,0.75; A3 0.25,0.75; A4 0.75,0.75; B1 -0.75,0.25; B2 -0.25,0.25; B3 0.25,0.25; B4 0.75,0.25; C1 -0.75,-0.25; C2 -0.25,-0.25; C3 0.25,-0.25; C4 0.75,-0.25; D1 -0.75,-0.75; D2 -0.25,-0.75; D3 0.25,-0.75; D4 0.75,-0.75
RNC0016A = smd 1.4 x 0.35: 1 -0.8,0.53; 2 -0.8,0; 3 -0.8,-0.53; 9 0.8,-0.53; 10 0.8,0; 11 0.8,0.53 | smd 0.25 x 0.6: 4 -1,-1.4; 5 -0.5,-1.4; 6 0,-1.4; 7 0.5,-1.4; 8 1,-1.4; 12 1,1.4; 13 0.5,1.4; 14 0,1.4; 15 -0.5,1.4; 16 -1,1.4
DRV0006A = smd 0.45 x 0.3: 1 -0.975,0.65; 2 -0.975,0; 3 -0.975,-0.65; 4 0.975,-0.65; 5 0.975,0; 6 0.975,0.65 | smd 1 x 1.6: 7 0,0
DRC0010J = smd 0.6 x 0.24: 1 -1.4,1; 2 -1.4,0.5; 3 -1.4,0; 4 -1.4,-0.5; 5 -1.4,-1; 6 1.4,-1; 7 1.4,-0.5; 8 1.4,0; 9 1.4,0.5; 10 1.4,1 | smd 1.65 x 2.4: 11 0,0
DRB0008A = smd 0.3 x 0.3: 1 -1.4,0.975; 2 -1.4,0.325; 3 -1.4,-0.325; 4 -1.4,-0.975; 5 1.4,-0.975; 6 1.4,-0.325; 7 1.4,0.325; 8 1.4,0.975 | smd 1.5 x 1.75: 9 0,0
DSQ0010A = smd 0.5 x 0.2: 1 -0.9,0.8; 2 -0.9,0.4; 3 -0.9,0; 4 -0.9,-0.4; 5 -0.9,-0.8; 6 0.9,-0.8; 7 0.9,-0.4; 8 0.9,0; 9 0.9,0.4; 10 0.9,0.8 | smd 0.9 x 1.5: 11 0,0
RGT0016C = smd 0.6 x 0.25: 1 -1.4,0.75; 2 -1.4,0.25; 3 -1.4,-0.25; 4 -1.4,-0.75; 9 1.4,-0.75; 10 1.4,-0.25; 11 1.4,0.25; 12 1.4,0.75 | smd 0.25 x 0.6: 5 -0.75,-1.4; 6 -0.25,-1.4; 7 0.25,-1.4; 8 0.75,-1.4; 13 0.75,1.4; 14 0.25,1.4; 15 -0.25,1.4; 16 -0.75,1.4 | smd 1.7 x 1.7: 17 0,0
DCU8 = smd 1.168 x 0.254: 1 -1.372,0.75; 2 -1.372,0.25; 3 -1.372,-0.25; 4 -1.372,-0.75; 5 1.372,-0.75; 6 1.372,-0.25; 7 1.372,0.25; 8 1.372,0.75
D8 = smd 1.981 x 0.559: 1 -2.464,1.905; 2 -2.464,0.635; 3 -2.464,-0.635; 4 -2.464,-1.905; 5 2.464,-1.905; 6 2.464,-0.635; 7 2.464,0.635; 8 2.464,1.905
SOIC28-1.27-17.9X7.5MM = smd 0.762 x 1.143: 1 -8.255,-4.75; 2 -6.985,-4.75; 3 -5.715,-4.75; 4 -4.445,-4.75; 5 -3.175,-4.75; 6 -1.905,-4.75; 7 -0.635,-4.75; 8 0.635,-4.75; 9 1.905,-4.75; 10 3.175,-4.75; 11 4.445,-4.75; 12 5.715,-4.75; 13 6.985,-4.75; 14 8.255,-4.75; 15 8.255,4.775; 16 6.985,4.775; 17 5.715,4.775; 18 4.445,4.775; 19 3.175,4.775; 20 1.905,4.775; 21 0.635,4.775; 22 -0.635,4.775; 23 -1.905,4.775; 24 -3.175,4.775; 25 -4.445,4.775; 26 -5.715,4.775; 27 -6.985,4.775; 28 -8.255,4.775
RHB0032D = smd 0.36 x 0.24: 1 -2.4,1.75; 2 -2.4,1.25; 3 -2.4,0.75; 4 -2.4,0.25; 5 -2.4,-0.25; 6 -2.4,-0.75; 7 -2.4,-1.25; 8 -2.4,-1.75; 17 2.4,-1.75; 18 2.4,-1.25; 19 2.4,-0.75; 20 2.4,-0.25; 21 2.4,0.25; 22 2.4,0.75; 23 2.4,1.25; 24 2.4,1.75 | smd 0.24 x 0.36: 9 -1.75,-2.4; 10 -1.25,-2.4; 11 -0.75,-2.4; 12 -0.25,-2.4; 13 0.25,-2.4; 14 0.75,-2.4; 15 1.25,-2.4; 16 1.75,-2.4; 25 1.75,2.4; 26 1.25,2.4; 27 0.75,2.4; 28 0.25,2.4; 29 -0.25,2.4; 30 -0.75,2.4; 31 -1.25,2.4; 32 -1.75,2.4 | smd 3.15 x 3.15: 33 0,0
DDC0006A_N = smd 1 x 0.6: 1 -1.375,0.95; 2 -1.375,0; 3 -1.375,-0.95; 4 1.375,-0.95; 5 1.375,0; 6 1.375,0.95
DCK6 = smd 1.168 x 0.356: 1 -0.978,0.65; 2 -0.978,0; 3 -0.978,-0.65; 4 0.978,-0.65; 5 0.978,0; 6 0.978,0.65
DGS0010A_N = smd 1.4 x 0.3: 1 -2.05,1; 2 -2.05,0.5; 3 -2.05,0; 4 -2.05,-0.5; 5 -2.05,-1; 6 2.05,-1; 7 2.05,-0.5; 8 2.05,0; 9 2.05,0.5; 10 2.05,1
SON65P300X300X100-9N = smd 0.86 x 0.31: 1 -1.425,0.975; 2 -1.425,0.325; 3 -1.425,-0.325; 4 -1.425,-0.975; 5 1.425,-0.975; 6 1.425,-0.325; 7 1.425,0.325; 8 1.425,0.975 | smd 1.55 x 2.3: 9 0,0
PWP0020A_N = smd 1.35 x 0.35: 1 -2.85,2.925; 2 -2.85,2.275; 3 -2.85,1.625; 4 -2.85,0.975; 5 -2.85,0.325; 6 -2.85,-0.325; 7 -2.85,-0.975; 8 -2.85,-1.625; 9 -2.85,-2.275; 10 -2.85,-2.925; 11 2.85,-2.925; 12 2.85,-2.275; 13 2.85,-1.625; 14 2.85,-0.975; 15 2.85,-0.325; 16 2.85,0.325; 17 2.85,0.975; 18 2.85,1.625; 19 2.85,2.275; 20 2.85,2.925 | smd 3 x 4.2: 21 0,0
SON65P300X300X100-9N' = smd 1.5 x 1.75: 9 0,0 | smd 0.23 x 0.825: 9_1 -0.325,1.288; 9_2 0.325,1.288; 9_3 -0.325,-1.288; 9_4 0.325,-1.288 | smd 0.86 x 0.33: EN 1.435,0.975; GND 1.435,-0.325; IN1 -1.435,0.975; IN2 -1.435,0.325; NC 1.435,0.325; NR/FB 1.435,-0.975; OUT1 -1.435,-0.325; OUT2 -1.435,-0.975
SOT65P210X110-5N = smd 1.168 x 0.356: 1 -1.041,0.66; 2 -1.041,0; 3 -1.041,-0.66; 4 1.041,-0.66; 5 1.041,0.66
MT40A1G8WE-083E:B = smd 0.47 x 0.47: A0 1.6,1.6; A1 4.8,1.6; A2 1.6,0.8; A3 4.8,2.4; A4 1.6,2.4; A5 5.6,1.6; A6 0.8,1.6; A7 5.6,0.8; A8 0.8,0.8; A9 4.8,0.8; A10/AP 1.6,3.2; A11 0.8,0; A12/BC_N 4.8,3.2; A13 5.6,0; A17/NC 4.8,0; ACT_N 1.6,4; ALERT_N 6.4,1.6; BA0 0.8,2.4; BA1 5.6,2.4; BG0 0.8,3.2; BG1 5.6,3.2; C0/CKE1 0.8,4.8; C1/CS1_N 5.6,4.8; C2/ODT1 0.8,5.6; CAS_N/A15 4.8,4; CK_C 5.6,5.6; CK_T 4.8,5.6; CKE 1.6,4.8; CS_N 4.8,4.8; DQ0 0.8,8; DQ1 4.8,8.8; DQ2 1.6,7.2; DQ3 4.8,7.2; DQ4/NF 0.8,7.2; DQ5/NF 5.6,7.2; DQ6/NF 1.6,6.4; DQ7/NF 4.8,6.4; DQS_C 1.6,8.8; DQS_I 1.6,8; NF/DM_N/DBI_N/TDQS_I 4.8,9.6; NF/TDQS_C 1.6,9.6; ODT 1.6,5.6; PAR 1.6,0; RAS_N/A16 5.6,4; RESET_N 0,1.6; TEN 6.4,4.8; VDD@1 0,9.6; VDD@2 4.8,8; VDD@3 0,5.6; VDD@4 6.4,5.6; VDD@5 0,4; VDD@6 6.4,3.2; VDD@7 0,0.8; VDD@8 6.4,0; VDDQ@1 0.8,8.8; VDDQ@2 5.6,8.8; VDDQ@3 0,8; VDDQ@4 6.4,8; VDDQ@5 0.8,6.4; VDDQ@6 5.6,6.4; VPP@1 0,8.8; VPP@2 6.4,0.8; VREFCA 0,3.2; VSS@1 6.4,9.6; VSS@2 5.6,8; VSS@3 0,6.4; VSS@4 6.4,6.4; VSS@5 0,4.8; VSS@6 6.4,4; VSS@7 0,2.4; VSS@8 6.4,2.4; VSS@9 0,0; VSSQ@1 0.8,9.6; VSSQ@2 5.6,9.6; VSSQ@3 0,7.2; VSSQ@4 6.4,7.2; WE_N/A14 0.8,4; ZQ 6.4,8.8
CR1220-THM = drill 2 pad 3.175: +1 -6.604,0; +2 6.604,0 | drill 0.8 pad 3.962 square: - 0,0
BGA153C50P14X14_1150X1300X100N = smd 0.26 x 0.26: A1 -3.25,3.25; A2 -2.75,3.25; A3 -2.25,3.25; A4 -1.75,3.25; A5 -1.25,3.25; A6 -0.75,3.25; A7 -0.25,3.25; A8 0.25,3.25; A9 0.75,3.25; A10 1.25,3.25; A11 1.75,3.25; A12 2.25,3.25; A13 2.75,3.25; A14 3.25,3.25; B1 -3.25,2.75; B2 -2.75,2.75; B3 -2.25,2.75; B4 -1.75,2.75; B5 -1.25,2.75; B6 -0.75,2.75; B7 -0.25,2.75; B8 0.25,2.75; B9 0.75,2.75; B10 1.25,2.75; B11 1.75,2.75; B12 2.25,2.75; B13 2.75,2.75; B14 3.25,2.75; C1 -3.25,2.25; C2 -2.75,2.25; C3 -2.25,2.25; C4 -1.75,2.25; C5 -1.25,2.25; C6 -0.75,2.25; C7 -0.25,2.25; C8 0.25,2.25; C9 0.75,2.25; C10 1.25,2.25; C11 1.75,2.25; C12 2.25,2.25; C13 2.75,2.25; C14 3.25,2.25; D1 -3.25,1.75; D2 -2.75,1.75; D3 -2.25,1.75; D4 -1.75,1.75; D12 2.25,1.75; D13 2.75,1.75; D14 3.25,1.75; E1 -3.25,1.25; E2 -2.75,1.25; E3 -2.25,1.25; E5 -1.25,1.25; E6 -0.75,1.25; E7 -0.25,1.25; E8 0.25,1.25; E9 0.75,1.25; E10 1.25,1.25; E12 2.25,1.25; E13 2.75,1.25; E14 3.25,1.25; F1 -3.25,0.75; F2 -2.75,0.75; F3 -2.25,0.75; F5 -1.25,0.75; F10 1.25,0.75; F12 2.25,0.75; F13 2.75,0.75; F14 3.25,0.75; G1 -3.25,0.25; G2 -2.75,0.25; G3 -2.25,0.25; G5 -1.25,0.25; G10 1.25,0.25; G12 2.25,0.25; G13 2.75,0.25; G14 3.25,0.25; H1 -3.25,-0.25; H2 -2.75,-0.25; H3 -2.25,-0.25; H5 -1.25,-0.25; H10 1.25,-0.25; H12 2.25,-0.25; H13 2.75,-0.25; H14 3.25,-0.25; J1 -3.25,-0.75; J2 -2.75,-0.75; J3 -2.25,-0.75; J5 -1.25,-0.75; J10 1.25,-0.75; J12 2.25,-0.75; J13 2.75,-0.75; J14 3.25,-0.75; K1 -3.25,-1.25; K2 -2.75,-1.25; K3 -2.25,-1.25; K5 -1.25,-1.25; K6 -0.75,-1.25; K7 -0.25,-1.25; K8 0.25,-1.25; K9 0.75,-1.25; K10 1.25,-1.25; K12 2.25,-1.25; K13 2.75,-1.25; K14 3.25,-1.25; L1 -3.25,-1.75; L2 -2.75,-1.75; L3 -2.25,-1.75; L12 2.25,-1.75; L13 2.75,-1.75; L14 3.25,-1.75; M1 -3.25,-2.25; M2 -2.75,-2.25; M3 -2.25,-2.25; M4 -1.75,-2.25; M5 -1.25,-2.25; M6 -0.75,-2.25; M7 -0.25,-2.25; M8 0.25,-2.25; M9 0.75,-2.25; M10 1.25,-2.25; M11 1.75,-2.25; M12 2.25,-2.25; M13 2.75,-2.25; M14 3.25,-2.25; N1 -3.25,-2.75; N2 -2.75,-2.75; N3 -2.25,-2.75; N4 -1.75,-2.75; N5 -1.25,-2.75; N6 -0.75,-2.75; N7 -0.25,-2.75; N8 0.25,-2.75; N9 0.75,-2.75; N10 1.25,-2.75; N11 1.75,-2.75; N12 2.25,-2.75; N13 2.75,-2.75; N14 3.25,-2.75; P1 -3.25,-3.25; P2 -2.75,-3.25; P3 -2.25,-3.25; P4 -1.75,-3.25; P5 -1.25,-3.25; P6 -0.75,-3.25; P7 -0.25,-3.25; P8 0.25,-3.25; P9 0.75,-3.25; P10 1.25,-3.25; P11 1.75,-3.25; P12 2.25,-3.25; P13 2.75,-3.25; P14 3.25,-3.25
JK0-2500NL = drill 0.889: LED_G+ 6.096,23.495; LED_G- 3.556,23.495; LED_YG_G+ -6.096,23.495; LED_YG_G- -3.556,23.495; MD1+ -4.064,20.955; MD1- -2.032,20.955; MD2+ -1.016,18.415; MD2- -3.048,18.415; MD3+ 1.016,18.415; MD3- 3.048,18.415; MD4+ 4.064,20.955; MD4- 2.032,20.955; MDCT1 -6.096,20.955; MDCT2 -5.08,18.415; MDCT3 5.08,18.415; MDCT4 6.096,20.955; VDC1+ -5.588,11.303; VDC1- 5.588,11.303; VDC2+ -5.588,9.83; VDC2- 5.588,9.83 | drill 1.575: SHIELD@1 -8.065,0; SHIELD@2 8.065,0 | hole 3.2: 6.35,3.175; -6.35,3.175
DIP254P762X432-8 = drill 0.991 square: 1 -7.62,7.62 | drill 0.991: 2 -7.62,5.08; 3 -7.62,2.54; 4 -7.62,0; 5 0,0; 6 0,2.54; 7 0,5.08; 8 0,7.62
SOT23-6 = smd 0.635 x 1.27: P$1 -0.953,-1.27; P$2 0,-1.27; P$3 0.953,-1.27; P$4 0.953,1.27; P$5 0,1.27; P$6 -0.953,1.27
FIL_NFM21PC105B1C3D = smd 0.6 x 0.8: 1 -1,0; 3 1,0 | smd 0.6 x 0.55: 2_1 0,0.675; 2_2 0,-0.675 | drill 0.4 pad 0.6: S1 0,1.15; S2 0,0; S3 0,-1.15
SOT-23 = smd 0.8 x 0.9: 1 -0.95,0; 2 0.95,0; 3 0,2
DB2441700L = smd 2.1 x 1.4: ANODE 0,0; CATHODE 0,4.4
XEL6030-152MEB = smd 5.5 x 1.43: P$1 0,0; P$2 0,4.04
XFL4015-471MEB = smd 3.4 x 0.98: P$1 0,0; P$2 0,2.37
XFL4020-102MEB = smd 3.4 x 0.98: V 0,0; V1 0,2.37
XEL4030-682ME_ = smd 3.4 x 0.98: P$1 0,0; P$2 0,2.37
BGA25C100P5X5_800X600X100 = smd 0.35 x 0.35: A2 -1,2; A3 0,2; A4 1,2; A5 2,2; B1 -2,1; B2 -1,1; B3 0,1; B4 1,1; B5 2,1; C1 -2,0; C2 -1,0; C3 0,0; C4 1,0; C5 2,0; D1 -2,-1; D2 -1,-1; D3 0,-1; D4 1,-1; D5 2,-1; E1 -2,-2; E2 -1,-2; E3 0,-2; E4 1,-2; E5 2,-2
XAL40XX = smd 3.4 x 0.98: P$1 0,0; P$2 0,2.37
SMB = smd 1.52 x 2.18: ANODE 0,0; CATHODE 3.875,0
SOIC127P600X175-8 = smd 1.509 x 0.731: 1 -2.703,1.905; 2 -2.703,0.635; 3 -2.703,-0.635; 4 -2.703,-1.905; 5 2.703,-1.905; 6 2.703,-0.635; 7 2.703,0.635; 8 2.703,1.905
5566-6 = drill 1.4 square: 1 4.2,-2.75; 2 0,-2.75; 3 -4.2,-2.75; 4 4.2,2.75; 5 0,2.75; 6 -4.2,2.75 | hole 3: 8.9,2.29; -8.9,2.29
32005-601 = drill 0.7 pad 1.016: 1 2.825,1.6; 2 1.625,0.8; 3 2.825,0; 4 1.625,-0.8; 5 2.825,-1.6 | drill 1 pad 1.422 long: M1 -2.225,3.65; M2 -2.225,-3.65
USB-A-H = drill 0.914: D+ 2.718,-1.003; D- 2.718,1.003; GND 2.718,-3.493; VBUS 2.718,3.493 | drill 2.311: P$5 0,-6.566; P$6 0,6.566
CRYSTAL-PTH-2X6-CYL = drill 0.813 pad 1.676: 1 -1.27,0; 2 1.27,0
CRYSTAL-SMD-5X3.2-4PAD = smd 1.9 x 1.1: 1 -1.85,-1.15; 2 1.85,-1.15; 3 1.85,1.15; 4 -1.85,1.15
CRYSTAL-SMD-3.2X2.5MM = smd 1.2 x 1.1: 1 -1.175,-0.875; 2 1.175,-0.875; 3 1.175,0.875; 4 -1.175,0.875

## Placement (x,y rotation side)
C1  0.1uF  [0603]  -163.83,151.13 0 top  (outside the outline)
C2  0.1uF  [0603]  -167.64,151.13 0 top  (outside the outline)
C3  0.1uF  [0603]  -171.45,151.13 0 top  (outside the outline)
C4  0.1uF  [0603]  -175.26,151.13 0 top  (outside the outline)
C5  0.1uF  [0603]  -179.07,151.13 0 top  (outside the outline)
C6  0.1uF  [0603]  -182.88,151.13 0 top  (outside the outline)
C7  0.1uF  [0603]  -186.69,151.13 0 top  (outside the outline)
C8  0.1uF  [0603]  -190.5,151.13 0 top  (outside the outline)
C9  0.1uF  [0603]  -194.31,151.13 0 top  (outside the outline)
C10  0.1uF  [0603]  -198.12,151.13 0 top  (outside the outline)
C11  0.1uF  [0603]  -201.93,151.13 0 top  (outside the outline)
C12  0.1uF  [0603]  -205.74,151.13 0 top  (outside the outline)
C13  0.1uF  [0603]  -209.55,151.13 0 top  (outside the outline)
C14  0.1uF  [0603]  -213.36,151.13 0 top  (outside the outline)
C15  0.1uF  [0603]  -217.17,151.13 0 top  (outside the outline)
C16  0.1uF  [0603]  -220.98,151.13 0 top  (outside the outline)
C17  0.1uF  [0603]  -224.79,151.13 0 top  (outside the outline)
C18  0.1uF  [0603]  -228.6,151.13 0 top  (outside the outline)
C19  0.1uF  [0603]  -232.41,151.13 0 top  (outside the outline)
C20  0.1uF  [0603]  -236.22,151.13 0 top  (outside the outline)
C21  0.1uF  [0603]  -240.03,151.13 0 top  (outside the outline)
C22  0.1uF  [0603]  -44.45,154.94 0 top  (outside the outline)
C23  0.1uF  [0603]  -48.26,154.94 0 top  (outside the outline)
C24  0.1uF  [0603]  -52.07,154.94 0 top  (outside the outline)
C25  0.01uF  [0603]  -55.88,154.94 0 top  (outside the outline)
C26  0.1uF  [0603]  -59.69,154.94 0 top  (outside the outline)
C27  0.1uF  [0603]  -63.5,154.94 0 top  (outside the outline)
C28  0.1uF  [0603]  -67.31,154.94 0 top  (outside the outline)
C29  0.1uF  [0603]  -71.12,154.94 0 top  (outside the outline)
C30  0.01uF  [0603]  -74.93,154.94 0 top  (outside the outline)
C31  2.2uF  [0603]  -78.74,154.94 0 top  (outside the outline)
C32  1uF  [0603]  -82.55,154.94 0 top  (outside the outline)
C33  15pF  [0603]  -86.36,154.94 0 top  (outside the outline)
C34  10uF  [0603]  -90.17,154.94 0 top  (outside the outline)
C35  0.01uF  [0402]  -64.77,189.23 0 top  (outside the outline)
C36  0.1uF  [0402]  -67.31,189.23 0 top  (outside the outline)
C37  1uF  [0402]  -69.85,189.23 0 top  (outside the outline)
C38  0.1uF  [0402]  -72.39,189.23 0 top  (outside the outline)
C39  0.1uF  [0402]  -74.93,189.23 0 top  (outside the outline)
C40  0.01uF  [0402]  -77.47,189.23 0 top  (outside the outline)
C41  0.01uF  [0402]  -80.01,189.23 0 top  (outside the outline)
C42  0.01uF  [0402]  -82.55,189.23 0 top  (outside the outline)
C43  0.01uF  [0402]  -85.09,189.23 0 top  (outside the outline)
C44  1uF  [0402]  -87.63,189.23 0 top  (outside the outline)
C45  0.1uF  [0402]  -90.17,189.23 0 top  (outside the outline)
C46  1uF  [0402]  -92.71,189.23 0 top  (outside the outline)
C47  2.2uF  [0603]  -93.98,154.94 0 top  (outside the outline)
C48  0.1uF  [0402]  -95.25,189.23 0 top  (outside the outline)
C49  18pF  [0603]  -97.79,154.94 0 top  (outside the outline)
C50  18pF  [0603]  -101.6,154.94 0 top  (outside the outline)
C51  0.1uF  [0402]  -97.79,189.23 0 top  (outside the outline)
C52  0.1uF  [0603]  -105.41,154.94 0 top  (outside the outline)
C53  0.1uF  [0402]  -100.33,189.23 0 top  (outside the outline)
C54  0.1uF  [0402]  -102.87,189.23 0 top  (outside the outline)
C55  0.1uF  [0402]  -105.41,189.23 0 top  (outside the outline)
C56  0.1uF  [0402]  -107.95,189.23 0 top  (outside the outline)
C57  0.1uF  [0402]  -110.49,189.23 0 top  (outside the outline)
C58  0.1uF  [0402]  -113.03,189.23 0 top  (outside the outline)
C59  0.1uF  [0402]  -115.57,189.23 0 top  (outside the outline)
C60  0.1uF  [0402]  -118.11,189.23 0 top  (outside the outline)
C61  0.1uF  [0402]  -120.65,189.23 0 top  (outside the outline)
C62  0.1uF  [0402]  -123.19,189.23 0 top  (outside the outline)
C63  0.1uF  [0402]  -125.73,189.23 0 top  (outside the outline)
C64  0.1uF  [0402]  -128.27,189.23 0 top  (outside the outline)
C65  0.01uF  [0402]  -130.81,189.23 0 top  (outside the outline)
C66  0.01uF  [0402]  -133.35,189.23 0 top  (outside the outline)
C67  0.01uF  [0402]  -135.89,189.23 0 top  (outside the outline)
C68  8.2pF  [0402]  -138.43,189.23 0 top  (outside the outline)
C69  0.01uF  [0402]  -140.97,189.23 0 top  (outside the outline)
C70  0.1uF  [0402]  -143.51,189.23 0 top  (outside the outline)
C71  0.1uF  [0402]  -146.05,189.23 0 top  (outside the outline)
C72  0.1uF  [0402]  -148.59,189.23 0 top  (outside the outline)
C73  0.1uF  [0402]  -151.13,189.23 0 top  (outside the outline)
C74  1uF  [0402]  -153.67,189.23 0 top  (outside the outline)
C75  1uF  [0402]  -156.21,189.23 0 top  (outside the outline)
C76  1uF  [0402]  -158.75,189.23 0 top  (outside the outline)
C77  1uF  [0402]  -161.29,189.23 0 top  (outside the outline)
C78  10uF  [0603]  -109.22,154.94 0 top  (outside the outline)
C79  0.1uF  [0402]  -163.83,189.23 0 top  (outside the outline)
C80  0.1uF  [0402]  -166.37,189.23 0 top  (outside the outline)
C81  0.1uF  [0402]  -168.91,189.23 0 top  (outside the outline)
C82  0.1uF  [0402]  -171.45,189.23 0 top  (outside the outline)
C83  1uF  [0402]  -173.99,189.23 0 top  (outside the outline)
C84  1uF  [0402]  -176.53,189.23 0 top  (outside the outline)
C85  0.1uF  [0402]  -179.07,189.23 0 top  (outside the outline)
C86  1uF  [0402]  -181.61,189.23 0 top  (outside the outline)
C87  10uF  [0603]  -113.03,154.94 0 top  (outside the outline)
C88  1uF  [0402]  -184.15,189.23 0 top  (outside the outline)
C89  1uF  [0402]  -186.69,189.23 0 top  (outside the outline)
C90  10uF  [0603]  -116.84,154.94 0 top  (outside the outline)
C91  0.1uF  [0603]  -120.65,154.94 0 top  (outside the outline)
C92  0.1uF  [0603]  -124.46,154.94 0 top  (outside the outline)
C93  0.1uF  [0603]  -128.27,154.94 0 top  (outside the outline)
C94  0.1uF  [0603]  -132.08,154.94 0 top  (outside the outline)
C95  0.1uF  [0603]  -135.89,154.94 0 top  (outside the outline)
C96  0.1uF  [0603]  -139.7,154.94 0 top  (outside the outline)
C97  8.2pF  [0402]  -189.23,189.23 0 top  (outside the outline)
C98  0.1uF  [0402]  -191.77,189.23 0 top  (outside the outline)
C99  2.2uF  [0201]  -43.18,214.63 0 top  (outside the outline)
C100  1uF  [0201]  -45.72,214.63 0 top  (outside the outline)
C101  1uF  [0201]  -48.26,214.63 0 top  (outside the outline)
C102  1uF  [0201]  -50.8,214.63 0 top  (outside the outline)
C103  1uF  [0201]  -53.34,214.63 0 top  (outside the outline)
C104  1uF  [0201]  -55.88,214.63 0 top  (outside the outline)
C105  1uF  [0201]  -58.42,214.63 0 top  (outside the outline)
C106  1uF  [0201]  -60.96,214.63 0 top  (outside the outline)
C107  1uF  [0201]  -63.5,214.63 0 top  (outside the outline)
C108  1uF  [0201]  -66.04,214.63 0 top  (outside the outline)
C109  1uF  [0201]  -68.58,214.63 0 top  (outside the outline)
C110  1uF  [0201]  -71.12,214.63 0 top  (outside the outline)
C111  2.2uF  [0201]  -73.66,214.63 0 top  (outside the outline)
C112  2.2uF  [0201]  -76.2,214.63 0 top  (outside the outline)
C113  2.2uF  [0201]  -78.74,214.63 0 top  (outside the outline)
C114  2.2uF  [0201]  -81.28,214.63 0 top  (outside the outline)
C115  2.2uF  [0201]  -83.82,214.63 0 top  (outside the outline)
C116  10uF  [0201]  -86.36,214.63 0 top  (outside the outline)
C117  10uF  [0201]  -88.9,214.63 0 top  (outside the outline)
C118  1uF  [0201]  -91.44,214.63 0 top  (outside the outline)
C119  1uF  [0201]  -93.98,214.63 0 top  (outside the outline)
C120  1uF  [0201]  -96.52,214.63 0 top  (outside the outline)
C121  1uF  [0201]  -99.06,214.63 0 top  (outside the outline)
C122  0.1uF  [0201]  -101.6,214.63 0 top  (outside the outline)
C123  0.1uF  [0201]  -104.14,214.63 0 top  (outside the outline)
C124  0.1uF  [0201]  -106.68,214.63 0 top  (outside the outline)
C125  0.1uF  [0201]  -109.22,214.63 0 top  (outside the outline)
C126  0.1uF  [0201]  -111.76,214.63 0 top  (outside the outline)
C127  0.1uF  [0201]  -114.3,214.63 0 top  (outside the outline)
C128  0.1uF  [0201]  -116.84,214.63 0 top  (outside the outline)
C129  0.1uF  [0201]  -119.38,214.63 0 top  (outside the outline)
C130  10uF  [0201]  -121.92,214.63 0 top  (outside the outline)
C131  10uF  [0201]  -124.46,214.63 0 top  (outside the outline)
C132  1uF  [0201]  -127,214.63 0 top  (outside the outline)
C133  1uF  [0201]  -129.54,214.63 0 top  (outside the outline)
C134  1uF  [0201]  -132.08,214.63 0 top  (outside the outline)
C135  1uF  [0201]  -134.62,214.63 0 top  (outside the outline)
C136  0.1uF  [0201]  -137.16,214.63 0 top  (outside the outline)
C137  0.1uF  [0201]  -139.7,214.63 0 top  (outside the outline)
C138  0.1uF  [0201]  -142.24,214.63 0 top  (outside the outline)
C139  0.1uF  [0201]  -144.78,214.63 0 top  (outside the outline)
C140  0.1uF  [0201]  -147.32,214.63 0 top  (outside the outline)
C141  0.1uF  [0201]  -149.86,214.63 0 top  (outside the outline)
C142  0.1uF  [0201]  -152.4,214.63 0 top  (outside the outline)
C143  0.1uF  [0201]  -154.94,214.63 0 top  (outside the outline)
C144  10uF  [0201]  -157.48,214.63 0 top  (outside the outline)
C145  10uF  [0201]  -160.02,214.63 0 top  (outside the outline)
C146  1uF  [0201]  -162.56,214.63 0 top  (outside the outline)
C147  1uF  [0201]  -165.1,214.63 0 top  (outside the outline)
C148  4.7uF  [0603]  -143.51,154.94 0 top  (outside the outline)
C149  4.7uF  [0603]  -147.32,154.94 0 top  (outside the outline)
C150  0.47uF  [0805]  -73.66,147.32 0 top  (outside the outline)
C151  1uF  [0603]  -151.13,154.94 0 top  (outside the outline)
C152  0.1uF  [0603]  -154.94,154.94 0 top  (outside the outline)
C153  0.1uF  [0603]  -158.75,154.94 0 top  (outside the outline)
C154  100pF  [0603]  -162.56,154.94 0 top  (outside the outline)
C155  0.01uF  [0603]  -166.37,154.94 0 top  (outside the outline)
C156  0.056uF  [0603]  -170.18,154.94 0 top  (outside the outline)
C157  47uF  [0805]  -78.74,147.32 0 top  (outside the outline)
C158  220uF  [E3,5-8]  -203.2,104.14 0 top  (outside the outline)
C159  100uF  [0805]  -83.82,147.32 0 top  (outside the outline)
C160  1uF  [0201]  -167.64,214.63 0 top  (outside the outline)
C161  47uF  [0805]  -88.9,147.32 0 top  (outside the outline)
C162  10uF  [0805]  -93.98,147.32 0 top  (outside the outline)
C163  1uF  [0805]  -99.06,147.32 0 top  (outside the outline)
C164  0.1uF  [0805]  -104.14,147.32 0 top  (outside the outline)
C165  0.01uF  [0603]  -173.99,154.94 0 top  (outside the outline)
C166  2.2uF  [0603]  -177.8,154.94 0 top  (outside the outline)
C167  0.47uF  [0603]  -181.61,154.94 0 top  (outside the outline)
C168  2.2uF  [0603]  -185.42,154.94 0 top  (outside the outline)
C169  33pF  [0603]  -189.23,154.94 0 top  (outside the outline)
C170  33pF  [0603]  -193.04,154.94 0 top  (outside the outline)
C171  0.056uF  [0603]  -196.85,154.94 0 top  (outside the outline)
C172  100pF  [0603]  -200.66,154.94 0 top  (outside the outline)
C173  0.01uF  [0603]  -204.47,154.94 0 top  (outside the outline)
C174  47uF  [0805]  -109.22,147.32 0 top  (outside the outline)
C175  10uF  [0603]  -208.28,154.94 0 top  (outside the outline)
C176  22uF  [0603]  -212.09,154.94 0 top  (outside the outline)
C177  22uF  [0603]  -215.9,154.94 0 top  (outside the outline)
C178  0.01uF  [0603]  -219.71,154.94 0 top  (outside the outline)
C179  1uF  [0603]  -223.52,154.94 0 top  (outside the outline)
C180  1uF  [0603]  -227.33,154.94 0 top  (outside the outline)
C181  10uF  [0603]  -231.14,154.94 0 top  (outside the outline)
C182  0.1uF  [0603]  -234.95,154.94 0 top  (outside the outline)
C183  22uF  [0603]  -238.76,154.94 0 top  (outside the outline)
C184  0.1uF  [0603]  -44.45,158.75 0 top  (outside the outline)
C185  0.1uF  [0603]  -48.26,158.75 0 top  (outside the outline)
C186  0.01uF  [0603]  -52.07,158.75 0 top  (outside the outline)
C187  47uF  [0805]  -114.3,147.32 0 top  (outside the outline)
C188  47uF  [0805]  -119.38,147.32 0 top  (outside the outline)
C189  47uF  [0805]  -124.46,147.32 0 top  (outside the outline)
C190  47uF  [0805]  -129.54,147.32 0 top  (outside the outline)
C191  1uF  [0603]  -55.88,158.75 0 top  (outside the outline)
C192  0.1uF  [0603]  -59.69,158.75 0 top  (outside the outline)
C193  10uF  [0805]  -134.62,147.32 0 top  (outside the outline)
C194  0.1uF  [0805]  -139.7,147.32 0 top  (outside the outline)
C195  0.1uF  [0603]  -63.5,158.75 0 top  (outside the outline)
C196  0.015uF  [0603]  -67.31,158.75 0 top  (outside the outline)
C197  150pF  [0603]  -71.12,158.75 0 top  (outside the outline)
C198  22uF  [0603]  -74.93,158.75 0 top  (outside the outline)
C199  22uF  [0603]  -78.74,158.75 0 top  (outside the outline)
C200  200pF  [0603]  -82.55,158.75 0 top  (outside the outline)
C201  0.01uF  [0603]  -86.36,158.75 0 top  (outside the outline)
C202  22uF_6.3V  [0603]  -76.2,151.13 0 top  (outside the outline)
C203  10uF  [0603]  -90.17,158.75 0 top  (outside the outline)
C204  2.2uF  [0603]  -93.98,158.75 0 top  (outside the outline)
C205  10uF  [0603]  -97.79,158.75 0 top  (outside the outline)
C206  0.1uF  [0603]  -101.6,158.75 0 top  (outside the outline)
C207  0.1uF  [0603]  -105.41,158.75 0 top  (outside the outline)
C208  0.22uF  [0603]  -109.22,158.75 0 top  (outside the outline)
C209  10uF  [0603]  -113.03,158.75 0 top  (outside the outline)
C210  22uF_6.3V  [0603]  -80.01,151.13 0 top  (outside the outline)
C211  0.01uF  [0603]  -116.84,158.75 0 top  (outside the outline)
C212  0.01uF  [0603]  -120.65,158.75 0 top  (outside the outline)
C213  22uF_6.3V  [0603]  -83.82,151.13 0 top  (outside the outline)
C214  22uF_6.3V  [0603]  -87.63,151.13 0 top  (outside the outline)
C215  DNI  [0603]  -124.46,158.75 0 top  (outside the outline)
C216  DNI  [0603]  -128.27,158.75 0 top  (outside the outline)
C217  DNI  [0603]  -132.08,158.75 0 top  (outside the outline)
C218  1uF  [0201]  -170.18,214.63 0 top  (outside the outline)
C219  0.1uF  [0201]  -172.72,214.63 0 top  (outside the outline)
C220  0.1uF  [0201]  -175.26,214.63 0 top  (outside the outline)
C221  0.1uF  [0201]  -177.8,214.63 0 top  (outside the outline)
C222  0.1uF  [0201]  -180.34,214.63 0 top  (outside the outline)
C223  0.1uF  [0201]  -182.88,214.63 0 top  (outside the outline)
C224  0.1uF  [0201]  -185.42,214.63 0 top  (outside the outline)
C225  0.1uF  [0201]  -187.96,214.63 0 top  (outside the outline)
C226  1uF  [0201]  -190.5,214.63 0 top  (outside the outline)
C227  1uF  [0201]  -193.04,214.63 0 top  (outside the outline)
C228  0.1uF  [0201]  -195.58,214.63 0 top  (outside the outline)
C229  0.1uF  [0201]  -198.12,214.63 0 top  (outside the outline)
C230  0.1uF  [0201]  -200.66,214.63 0 top  (outside the outline)
C231  10uF  [0201]  -203.2,214.63 0 top  (outside the outline)
C232  10uF  [0201]  -205.74,214.63 0 top  (outside the outline)
C233  1uF  [0201]  -208.28,214.63 0 top  (outside the outline)
C234  1uF  [0201]  -210.82,214.63 0 top  (outside the outline)
C235  0.1uF  [0201]  -213.36,214.63 0 top  (outside the outline)
C236  0.1uF  [0201]  -215.9,214.63 0 top  (outside the outline)
C237  0.1uF  [0201]  -218.44,214.63 0 top  (outside the outline)
C238  0.1uF  [0201]  -220.98,214.63 0 top  (outside the outline)
C239  0.1uF  [0201]  -223.52,214.63 0 top  (outside the outline)
C240  0.1uF  [0201]  -226.06,214.63 0 top  (outside the outline)
C241  10uF  [0201]  -228.6,214.63 0 top  (outside the outline)
C242  10uF  [0201]  -231.14,214.63 0 top  (outside the outline)
C243  1uF  [0201]  -233.68,214.63 0 top  (outside the outline)
C244  1uF  [0201]  -236.22,214.63 0 top  (outside the outline)
C245  0.1uF  [0201]  -238.76,214.63 0 top  (outside the outline)
C246  0.1uF  [0201]  -241.3,214.63 0 top  (outside the outline)
C247  0.1uF  [0201]  -43.18,217.17 0 top  (outside the outline)
C248  0.1uF  [0201]  -45.72,217.17 0 top  (outside the outline)
C249  0.1uF  [0201]  -48.26,217.17 0 top  (outside the outline)
C250  10uF  [0201]  -50.8,217.17 0 top  (outside the outline)
C251  10uF  [0201]  -53.34,217.17 0 top  (outside the outline)
C252  1uF  [0201]  -55.88,217.17 0 top  (outside the outline)
C253  1uF  [0201]  -58.42,217.17 0 top  (outside the outline)
C254  1uF  [0201]  -60.96,217.17 0 top  (outside the outline)
C255  1uF  [0201]  -63.5,217.17 0 top  (outside the outline)
C256  0.1uF  [0201]  -66.04,217.17 0 top  (outside the outline)
C257  0.1uF  [0201]  -68.58,217.17 0 top  (outside the outline)
C258  0.1uF  [0201]  -71.12,217.17 0 top  (outside the outline)
C259  0.1uF  [0201]  -73.66,217.17 0 top  (outside the outline)
C260  0.1uF  [0201]  -76.2,217.17 0 top  (outside the outline)
C261  0.1uF  [0201]  -78.74,217.17 0 top  (outside the outline)
C262  0.1uF  [0201]  -81.28,217.17 0 top  (outside the outline)